# Allegro board AX7201-Carrier.brd
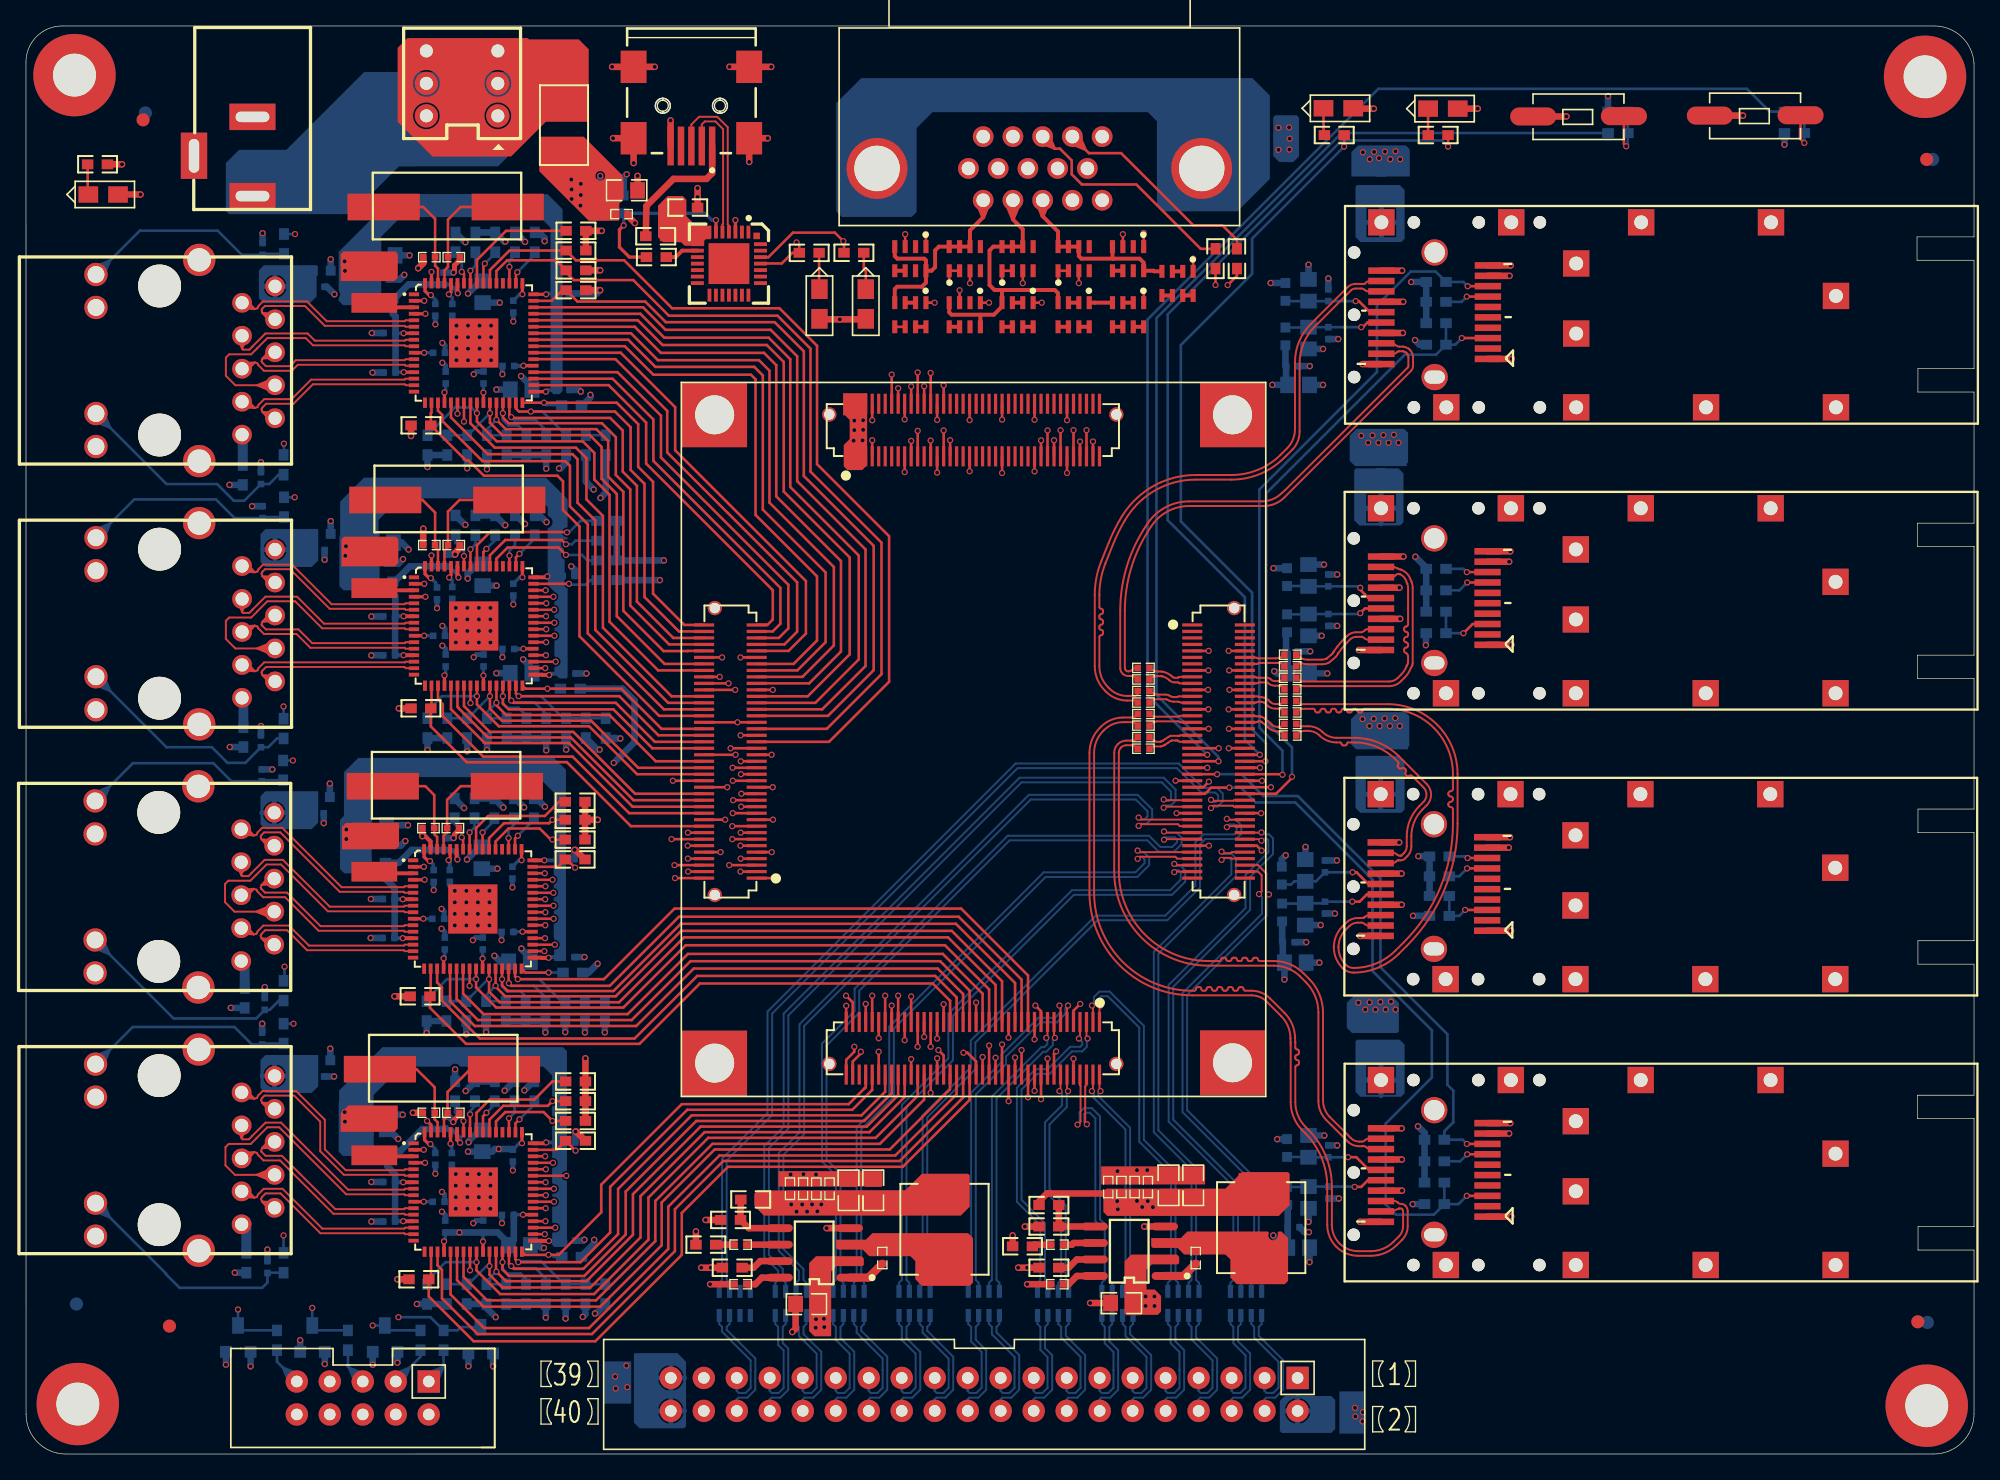
[diagram p0: board, top side]
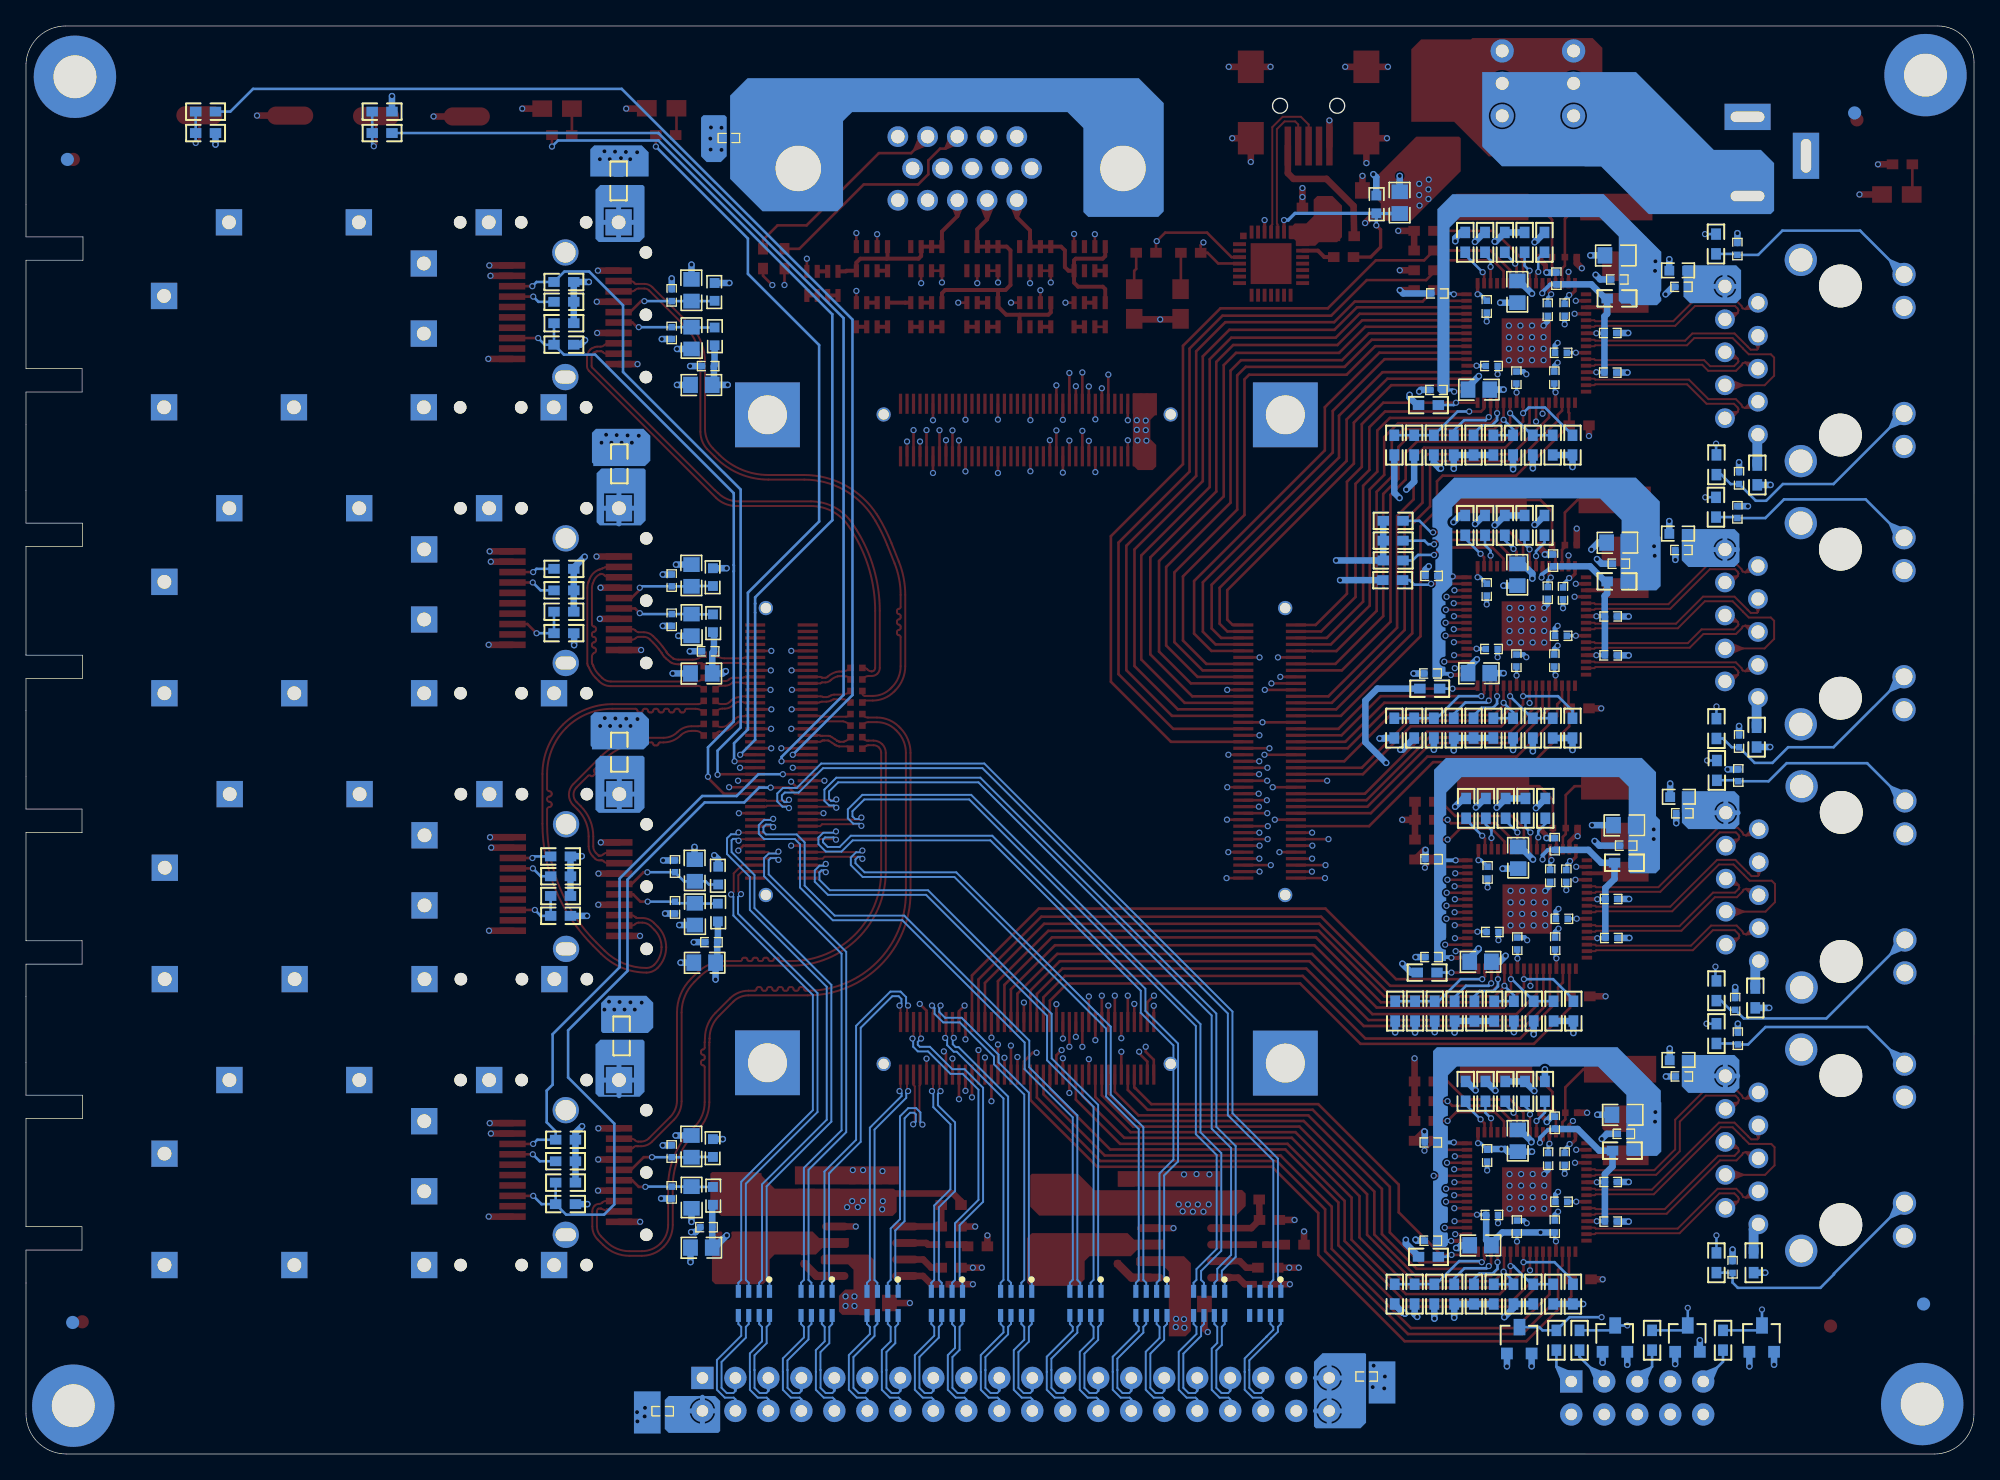
[diagram p1: board, bottom side, seen from below]

Outline 150 x 110 mm; copper layers: TOP, SGND, SVCC, BOTTOM. Coordinates in mm from the lower left corner of the outline.
Outline path: 0,107.21 arc(0.82,109.18) 2.79,110 146.94,110 arc(149.05,109.16) 150,107.1 150,93.75 145.61,93.75 145.61,91.95 150,91.95 150,83.6 145.68,83.6 145.68,81.8 150,81.8 150,71.7 145.65,71.7 145.65,69.9 150,69.9 150,61.53 145.65,61.53 145.65,59.73 150,59.73 150,49.68 145.68,49.68 145.68,47.88 145.69,47.88 150,47.88 150,39.54 150,39.54 145.68,39.54 145.68,37.74 150,37.74 150,27.64 145.66,27.64 145.66,25.84 145.67,25.85 150,25.85 150,17.51 145.69,17.51 145.69,15.71 150,15.71 150,13.13 150,3.1 arc(149.09,0.91) 146.91,0 3.07,0 arc(0.91,0.9) 0.01,3.07 0,107.21

## Design rules (mm)
net group IO1_15N: nets IO1_15N IO1_15P
net group N16786323: nets N16786264 N16786323
net group PHY_MDI0_N: nets E3_PHY_MDI0_N E3_PHY_MDI0_P
net group PHY_MDI1_N: nets E3_PHY_MDI1_N E3_PHY_MDI1_P
net group PHY_MDI2_P: nets E3_PHY_MDI2_N E3_PHY_MDI2_P
net group PHY_MDI3_N: nets E3_PHY_MDI3_N E3_PHY_MDI3_P
net group J4-DIFF: nets EX_IO1_1N EX_IO1_1P EX_IO1_2N EX_IO1_2P EX_IO1_3N EX_IO1_3P EX_IO1_4N EX_IO1_4P EX_IO1_5N EX_IO1_5P EX_IO1_6N EX_IO1_6P EX_IO1_7N EX_IO1_7P EX_IO1_8N EX_IO1_8P EX_IO1_9N EX_IO1_9P EX_IO1_10N EX_IO1_10P EX_IO1_11N EX_IO1_11P EX_IO1_12N EX_IO1_12P EX_IO1_13N EX_IO1_13P EX_IO1_14N EX_IO1_14P EX_IO1_15N EX_IO1_15P EX_IO1_16N EX_IO1_16P EX_IO1_17N EX_IO1_17P IO1_1N IO1_1P IO1_2N IO1_2P IO1_3N IO1_3P IO1_4N IO1_4P IO1_5N IO1_5P IO1_6N IO1_6P IO1_7N IO1_7P IO1_8N IO1_8P IO1_9N IO1_9P IO1_10N IO1_10P IO1_11N IO1_11P IO1_12N IO1_12P IO1_13N IO1_13P IO1_14N IO1_14P IO1_16N IO1_16P IO1_17N IO1_17P
net group MGT: nets MGT_CLK1_N MGT_CLK1_P MGT_RX0_N MGT_RX0_P MGT_RX1_N MGT_RX1_P MGT_RX2_N MGT_RX2_P MGT_RX3_N MGT_RX3_P MGT_TX0_N MGT_TX0_P MGT_TX1_N MGT_TX1_P MGT_TX2_N MGT_TX2_P MGT_TX3_N MGT_TX3_P SFP1_RX_N SFP1_RX_P SFP1_TX_N SFP1_TX_P SFP2_RX_N SFP2_RX_P SFP2_TX_N SFP2_TX_P SFP3_RX_N SFP3_RX_P SFP3_TX_N SFP3_TX_P SFP4_RX_N SFP4_RX_P SFP4_TX_N SFP4_TX_P
net group PHY_MDI: nets E1_PHY_MDI0_N E1_PHY_MDI0_P E1_PHY_MDI1_N E1_PHY_MDI1_P E1_PHY_MDI2_N E1_PHY_MDI2_P E1_PHY_MDI3_N E1_PHY_MDI3_P E2_PHY_MDI0_N E2_PHY_MDI0_P E2_PHY_MDI1_N E2_PHY_MDI1_P E2_PHY_MDI2_N E2_PHY_MDI2_P E2_PHY_MDI3_N E2_PHY_MDI3_P E4_PHY_MDI0_N E4_PHY_MDI0_P E4_PHY_MDI1_N E4_PHY_MDI1_P E4_PHY_MDI2_N E4_PHY_MDI2_P E4_PHY_MDI3_N E4_PHY_MDI3_P
net group VGA_B: nets N16979107 N16979113 N16979117 VGA_B VGA_B0
net group VGA_G: nets N16978989 N16978991 N16978997 N16979015 VGA_G

## Placement (name value [footprint] x y rotation side)
C1  0.1uF  [C0402]  97.36 61.57 0 top
C2  0.1uF  [C0402]  97.36 60.68 0 top
C3  0.1uF  [C0402]  86.06 60.55 0 top
C4  0.1uF  [C0402]  97.36 59.79 0 top
C5  0.1uF  [C0402]  86.06 59.66 0 top
C6  0.1uF  [C0402]  97.36 58.9 0 top
C7  0.1uF  [C0402]  86.06 58.78 0 top
C8  0.1uF  [C0402]  97.36 58.01 0 top
C9  0.1uF  [C0402]  86.06 57.89 0 top
C10  0.1uF  [C0402]  97.36 57.12 0 top
C11  0.1uF  [C0402]  86.06 57 0 top
C12  0.1uF  [C0402]  97.36 56.24 0 top
C13  0.1uF  [C0402]  86.06 56.11 0 top
C14  0.1uF  [C0402]  97.36 55.35 0 top
C15  0.1uF  [C0402]  86.06 55.22 0 top
C16  0.1uF  [C0402]  86.06 54.33 0 top
C17  22uF  [C0805]  27.05 26.14 0 bottom
C18  0.1uF  [C0402]  26.97 24.66 0 bottom
C19  0.1uF  [C0402]  32.28 25.53 90 bottom
C20  0.1uF  [C0402]  27.97 20.95 180 bottom
C21  0.1uF  [C0402]  27.97 17.91 180 bottom
C22  22uF  [C0805]  38 16.08 0 bottom
C23  0.1uF  [C0402]  31.52 22.73 270 bottom
C24  22uF  [C0805]  35.13 24.13 90 bottom
C25  0.1uF  [C0402]  37.11 18.41 180 bottom
C26  0.1uF  [C0402]  32.79 22.73 270 bottom
C27  0.1uF  [C0402]  37.49 22.99 270 bottom
C28  0.1uF  [C0402]  35.2 17.53 90 bottom
C29  0.1uF  [C0402]  31.78 19.43 0 bottom
C30  0.1uF  [C0402]  32.28 17.53 90 bottom
C31  0.1uF  [C0402]  41.83 24 0 bottom
C32  0.1uF  [C0402]  41.83 16.43 0 bottom
C33  0.1uF  [C0402]  18.59 14.4 90 bottom
C34  0.1uF  [C0402]  18.19 32 90 bottom
C35  0.1uF  [C0402]  22.5 29.08 0 bottom
C36  1uF  [C0603]  22.75 30.33 0 bottom
C37  22pF  [C0402]  32.92 26.29 0 top
C38  22pF  [C0402]  31.01 26.29 180 top
C39  22uF  [C0805]  26.92 48.44 0 bottom
C40  0.1uF  [C0402]  41.78 38.28 0 bottom
C41  0.1uF  [C0402]  32.28 46.99 90 bottom
C42  0.1uF  [C0402]  27.91 39.75 180 bottom
C43  0.1uF  [C0402]  27.93 42.75 180 bottom
C44  22uF  [C0805]  38 37.92 0 bottom
C45  0.1uF  [C0402]  37.46 44.79 270 bottom
C46  22uF  [C0805]  35.1 45.93 90 bottom
C47  0.1uF  [C0402]  37.08 40.21 180 bottom
C48  0.1uF  [C0402]  32.25 39.32 90 bottom
C49  0.1uF  [C0402]  31.74 41.23 0 bottom
C50  0.1uF  [C0402]  31.39 44.53 270 bottom
C51  0.1uF  [C0402]  35.17 39.32 90 bottom
C52  0.1uF  [C0402]  32.63 44.53 270 bottom
C53  0.1uF  [C0402]  26.8 46.86 0 bottom
C54  0.1uF  [C0402]  41.78 45.82 0 bottom
C55  0.1uF  [C0402]  18.39 34.67 90 bottom
C56  0.1uF  [C0402]  18.15 52.28 90 bottom
C57  0.1uF  [C0402]  22.47 49.36 0 bottom
C58  1uF  [C0603]  22.71 50.6 0 bottom
C59  22pF  [C0402]  32.89 48.21 0 top
C60  22pF  [C0402]  30.98 48.21 180 top
C61  22uF  [C0805]  27.46 70.21 0 bottom
C62  0.1uF  [C0402]  27.36 68.58 0 bottom
C63  0.1uF  [C0402]  32.41 68.83 90 bottom
C64  0.1uF  [C0402]  27.97 61.52 180 bottom
C65  0.1uF  [C0402]  27.97 64.52 180 bottom
C66  22uF  [C0805]  35.16 67.73 90 bottom
C67  0.1uF  [C0402]  31.81 63.03 0 bottom
C68  22uF  [C0805]  38.13 60.15 0 bottom
C69  0.1uF  [C0402]  37.52 66.58 270 bottom
C70  0.1uF  [C0402]  31.65 66.29 270 bottom
C71  0.1uF  [C0402]  35.24 61.12 90 bottom
C72  0.1uF  [C0402]  37.14 62.01 180 bottom
C73  0.1uF  [C0402]  32.32 61.12 90 bottom
C74  0.1uF  [C0402]  32.82 66.33 270 bottom
C75  0.1uF  [C0402]  41.78 67.64 0 bottom
C76  0.1uF  [C0402]  41.86 60.12 0 bottom
C77  0.1uF  [C0402]  18.09 54.9 90 bottom
C78  0.1uF  [C0402]  18.22 72.55 90 bottom
C79  0.1uF  [C0402]  22.54 69.63 0 bottom
C80  1uF  [C0603]  22.78 70.88 0 bottom
C81  22pF  [C0402]  32.95 70.01 0 top
C82  22pF  [C0402]  31.05 70.01 180 top
C83  22uF  [C0805]  27.58 92.33 0 bottom
C84  0.1uF  [C0402]  41.4 81.97 0 bottom
C85  0.1uF  [C0402]  28 86.35 180 bottom
C86  0.1uF  [C0402]  28 83.3 180 bottom
C87  0.1uF  [C0402]  32.16 90.55 90 bottom
C88  22uF  [C0805]  38.13 81.99 0 bottom
C89  0.1uF  [C0402]  35.24 82.92 90 bottom
C90  22uF  [C0805]  35.16 89.52 90 bottom
C91  0.1uF  [C0402]  37.14 83.81 180 bottom
C92  0.1uF  [C0402]  32.82 88.13 270 bottom
C93  0.1uF  [C0402]  32.32 82.92 90 bottom
C94  0.1uF  [C0402]  37.52 88.38 270 bottom
C95  0.1uF  [C0402]  31.52 88.14 270 bottom
C96  0.1uF  [C0402]  31.81 84.83 0 bottom
C97  0.1uF  [C0402]  27.48 90.47 0 bottom
C98  0.1uF  [C0402]  41.33 89.4 0 bottom
C99  0.1uF  [C0402]  18.09 75.17 90 bottom
C100  0.1uF  [C0402]  18.22 92.83 90 bottom
C101  0.1uF  [C0402]  22.54 89.91 0 bottom
C102  1uF  [C0603]  22.78 91.15 0 bottom
C103  22pF  [C0402]  32.95 92.19 0 top
C104  22pF  [C0402]  31.05 92.19 180 top
C105  10uF  [C0805]  98.5 44.95 90 bottom
C106  0.1uF  [C0402]  100.03 45.27 90 bottom
C107  10uF  [C0805]  98.5 41.58 270 bottom
C108  22uF  [C0805]  97.74 37.85 0 bottom
C109  0.1uF  [C0402]  97.23 39.43 0 bottom
C110  0.1uF  [C0402]  100.03 42.09 270 bottom
C111  22uF  [C0805]  97.99 15.9 0 bottom
C112  10uF  [C0805]  98.76 23.7 90 bottom
C113  0.1uF  [C0402]  100.28 23.32 90 bottom
C114  0.1uF  [C0402]  97.61 17.47 0 bottom
C115  10uF  [C0805]  98.76 19.76 270 bottom
C116  0.1uF  [C0402]  100.28 20.14 270 bottom
C117  22uF  [C0805]  97.99 60.13 0 bottom
C118  0.1uF  [C0402]  97.49 61.83 0 bottom
C119  10uF  [C0805]  98.76 67.67 90 bottom
C120  0.1uF  [C0402]  100.28 67.29 90 bottom
C121  10uF  [C0805]  98.76 63.86 270 bottom
C122  0.1uF  [C0402]  100.28 64.24 270 bottom
C123  10uF  [C0805]  98.76 89.64 90 bottom
C124  0.1uF  [C0402]  100.28 89.26 90 bottom
C125  10uF  [C0805]  98.76 85.96 270 bottom
C126  22uF  [C0805]  97.99 82.35 0 bottom
C127  0.1uF  [C0402]  97.49 83.8 0 bottom
C128  0.1uF  [C0402]  100.28 86.34 270 bottom
C129  1uF  [C0603]  46.02 96.25 90 bottom
C130  10uF  [C0805]  44.22 96.39 90 bottom
C131  0.1uF  [C0402]  100.99 3.3 0 bottom
C132  0.1uF  [C0402]  46.76 5.97 180 bottom
C133  10uF  [C0805]  46.25 97.33 0 top
C134  0.1uF  [C0402]  45.87 95.5 0 top
C135  0.01uF  [C0402]  90.07 15.11 90 top
C136  10uF  [C0805]  84.35 11.63 180 top
C137  0.1uF  [C0402]  79.4 13.08 180 top
C138  10uF  [C0805]  89.89 20.7 90 top
C139  10uF  [C0805]  87.99 20.7 90 top
C140  0.1uF  [C0402]  83.34 20.57 90 top
C141  0.1uF  [C0402]  84.35 20.57 90 top
C142  0.1uF  [C0402]  85.37 20.57 90 top
C143  0.1uF  [C0402]  86.39 20.57 90 top
C144  33nF  [C0402]  79.4 16.13 180 top
C145  0.01uF  [C0402]  65.94 15.11 90 top
C146  10uF  [C0805]  60.1 11.56 180 top
C147  10uF  [C0805]  65.25 20.32 90 top
C148  10uF  [C0805]  63.35 20.32 90 top
C149  0.1uF  [C0402]  58.83 20.45 90 top
C150  0.1uF  [C0402]  59.84 20.45 90 top
C151  0.1uF  [C0402]  60.86 20.45 90 top
C152  0.1uF  [C0402]  61.87 20.45 90 top
C153  0.1uF  [C0402]  55.02 13.08 180 top
C154  33nF  [C0402]  55.02 16.13 180 top
C261  0.1uF  [C0402]  95.86 101.37 180 bottom
CN1  AJ243-3-3C  [CN1-DCJACK]  17.44 103 180 top
CON1  -  [AXK680337YG]  72.91 78.87 0 top
CON2  -  [AXK680337YG]  54.24 54.11 90 top
CON3  -  [AXK680337YG]  72.91 31.25 180 top
CON4  -  [AXK680337YG]  91.83 54.11 270 top
D1  BAT54S  [SOT23]  35.97 7.75 180 bottom
D2  BAT54S  [SOT23]  28.6 7.87 180 bottom
D3  BAT54S  [SOT23]  23.01 7.87 180 bottom
D4  BAT54S  [SOT23]  17.3 7.87 180 bottom
F1  2A  [FUSE_1812]  41.43 102.36 270 top
J1  HR911130A  [GE_RJ45]  10.26 29.15 180 top
J2  HR911130A  [GE_RJ45]  10.22 49.42 180 top
J3  HR911130A  [GE_RJ45]  10.29 69.7 180 top
J4  HR911130A  [GE_RJ45]  10.29 89.97 180 top
J5  SFP CAGEx1  [SD-74737-0033]  112.51 40.31 180 top
J6  SFP CAGEx1  [SD-74737-0033]  112.54 18.29 180 top
J7  SFP CAGEx1  [SD-74737-0033]  112.54 62.33 180 top
J8  SFP CAGEx1  [SD-74737-0033]  112.57 84.35 180 top
J9  HEADER 5X2  [JTAG-10]  31.01 5.59 180 top
J10  MINI_USB  [MINIUSBB]  51.24 100.75 270 top
J11  HEADER 20x2/M  [IDC-40J]  73.78 4.59 180 top
J23  VGA Connector  [VGA]  74.86 99.03 90 top
KEY1  Button  [KEY735SO]  123.04 103.05 180 top
KEY2  Button  [KEY735SO]  136.64 103.12 180 top
L1  2.2uH  [LVS303010]  26.82 23.51 0 top
L2  2.2uH  [LVS303010]  26.82 45.36 0 top
L3  2.2uH  [LVS303010]  26.82 67.2 0 top
L4  2.2uH  [LVS303010]  26.82 89.17 0 top
L5  220Ohm@100MHz  [L0603]  96.72 41.71 90 bottom
L6  220Ohm@100MHz  [L0603]  96.7 44.56 270 bottom
L7  220Ohm@100MHz  [L0603]  97.1 19.89 90 bottom
L8  220Ohm@100MHz  [L0603]  97.1 23.57 270 bottom
L9  220Ohm@100MHz  [L0603]  97.1 63.99 90 bottom
L10  220Ohm@100MHz  [L0603]  97.1 67.55 270 bottom
L11  220Ohm@100MHz  [L0603]  96.98 86.09 90 bottom
L12  220Ohm@100MHz  [L0603]  96.98 89.52 270 bottom
L13  10uH  [SMTDR75-100M]  95.11 17.44 90 top
L14  10uH  [SMTDR75-100M]  70.73 17.31 90 top
LED1  RED  [LEDSO]  99.91 103.66 0 top
LED2  RED  [LEDSO]  107.96 103.63 0 top
LED3  RED  [LEDSO]  64.66 89.73 270 top
LED4  RED  [LEDSO]  61.1 89.73 270 top
LED5  RED  [LEDSO]  4.8 97.02 0 top
NOREF  -  [unnamed]  146.23 106.09 0 top
NOREF#2  -  [#2]  0 4.13 0 top
NOREF#3  -  [unnamed]  3.99 3.85 0 top
NOREF#4  -  [unnamed#2]  92.9 30.14 90 top
NOREF#5  -  [unnamed#2]  53.03 30.11 90 top
NOREF#6  -  [unnamed#3]  9.02 102.77 0 top
NOREF#7  -  [unnamed#3]  11.05 9.86 0 top
NOREF#8  -  [unnamed#3]  145.67 10.19 0 top
NOREF#9  -  [unnamed#2]  53.03 80.05 90 top
NOREF#10  -  [unnamed#2]  92.9 80.05 90 top
NOREF#11  -  [unnamed]  3.74 106.21 0 top
NOREF#12  -  [unnamed#3]  146.35 99.72 0 top
NOREF#13  -  [unnamed]  146.36 3.72 0 top
NOREF#14  -  [#2]  3.66 0.01 90 top
NOREF#15  -  [#2]  295.55 15.74 0 top
NOREF#16  -  [unnamed#3]  146.41 10.13 180 bottom
NOREF#17  -  [unnamed#3]  3.89 11.56 180 bottom
NOREF#18  -  [unnamed#3]  9.19 103.3 180 bottom
NOREF#19  -  [unnamed#3]  146.81 99.72 180 bottom
R1  0R  [R0603]  27.08 23.36 0 bottom
R2  1.5K  [R0603]  42.32 25.66 0 top
R3  1.5K  [R0603]  42.32 27.18 0 top
R4  0R  [R0603]  16.97 14.73 90 bottom
R5  330R  [R0603]  19.83 32.38 270 bottom
R6  1K  [R0603]  42.32 24.13 180 top
R7  330R  [R0603]  19.83 14.73 270 bottom
R8  2.49K  [R0603]  33.04 27.94 270 bottom
R9  4.7K  [R0603]  42.01 15.19 180 bottom
R10  4.7K  [R0603]  41.56 12.32 90 bottom
R11  10K  [R0603]  42.32 28.7 180 top
R12  10K  [R0603]  36.1 27.94 90 bottom
R13  10K  [R0603]  34.57 27.94 90 bottom
R14  10K  [R0603]  32.41 12.32 270 bottom
R15  10K  [R0603]  36.98 12.32 270 bottom
R16  NC  [R0603]  43.07 12.32 270 bottom
R17  4.7K  [R0603]  39.14 27.94 90 bottom
R18  4.7K  [R0603]  37.62 27.94 90 bottom
R19  10K  [R0603]  30.88 12.32 270 bottom
R20  10K  [R0603]  38.5 12.32 270 bottom
R21  10K  [R0603]  40.03 12.32 270 bottom
R22  4.7K  [R0603]  30.25 13.46 180 top
R23  NC  [R0603]  33.94 12.32 90 bottom
R24  NC  [R0603]  35.46 12.32 90 bottom
R25  10K  [R0603]  44.61 12.32 90 bottom
R26  0R  [R0603]  26.92 45.54 0 bottom
R27  1.5K  [R0603]  42.28 47.33 0 top
R28  330R  [R0603]  19.83 35.69 270 bottom
R29  1.5K  [R0603]  42.28 48.85 0 top
R30  330R  [R0603]  19.8 52.66 270 bottom
R31  0R  [R0603]  16.84 35.13 90 bottom
R32  1K  [R0603]  42.28 45.8 180 top
R33  2.49K  [R0603]  33.01 49.74 270 bottom
R34  4.7K  [R0603]  42.11 37.09 180 bottom
R35  4.7K  [R0603]  41.52 34.12 90 bottom
R36  10K  [R0603]  42.28 50.24 180 top
R37  10K  [R0603]  36.06 49.74 90 bottom
R38  10K  [R0603]  34.54 49.74 90 bottom
R39  10K  [R0603]  36.95 34.12 270 bottom
R40  4.7K  [R0603]  39.11 49.74 90 bottom
R41  10K  [R0603]  38.47 34.12 270 bottom
R42  10K  [R0603]  39.99 34.12 270 bottom
R43  10K  [R0603]  32.37 34.12 270 bottom
R44  NC  [R0603]  43.04 34.12 270 bottom
R45  10K  [R0603]  30.85 34.12 270 bottom
R46  4.7K  [R0603]  37.59 49.74 90 bottom
R47  4.7K  [R0603]  30.35 35.26 180 top
R48  NC  [R0603]  33.9 34.12 90 bottom
R49  NC  [R0603]  35.43 34.12 90 bottom
R50  10K  [R0603]  44.57 34.12 90 bottom
R51  0R  [R0603]  27.49 67.22 0 bottom
R52  330R  [R0603]  19.83 55.88 270 bottom
R53  1.5K  [R0603]  44.73 68.83 0 bottom
R54  1.5K  [R0603]  44.73 70.35 0 bottom
R55  330R  [R0603]  19.87 72.93 270 bottom
R56  0R  [R0603]  16.74 55.22 90 bottom
R57  1K  [R0603]  44.75 67.31 180 bottom
R58  2.49K  [R0603]  33.07 71.54 270 bottom
R59  4.7K  [R0603]  41.91 58.96 180 bottom
R60  4.7K  [R0603]  41.59 55.92 90 bottom
R61  10K  [R0603]  44.73 71.89 180 bottom
R62  10K  [R0603]  36.13 71.54 90 bottom
R63  10K  [R0603]  34.61 71.54 90 bottom
R64  4.7K  [R0603]  39.18 71.54 90 bottom
R65  10K  [R0603]  30.92 55.92 270 bottom
R66  10K  [R0603]  38.54 55.92 270 bottom
R67  10K  [R0603]  40.06 55.92 270 bottom
R68  10K  [R0603]  32.44 55.92 270 bottom
R69  10K  [R0603]  37.01 55.92 270 bottom
R70  NC  [R0603]  43.11 55.92 270 bottom
R71  4.7K  [R0603]  37.65 71.54 90 bottom
R72  4.7K  [R0603]  30.41 57.44 180 top
R73  NC  [R0603]  33.97 55.92 90 bottom
R74  NC  [R0603]  35.49 55.92 90 bottom
R75  10K  [R0603]  44.64 55.92 90 bottom
R76  0R  [R0603]  27.49 89.01 0 bottom
R77  1.5K  [R0603]  42.35 91.18 0 top
R78  1.5K  [R0603]  42.35 92.7 0 top
R79  330R  [R0603]  19.83 76.2 270 bottom
R80  0R  [R0603]  16.69 75.41 90 bottom
R81  330R  [R0603]  19.87 93.21 270 bottom
R82  1K  [R0603]  42.35 89.65 180 top
R83  2.49K  [R0603]  33.07 93.33 270 bottom
R84  4.7K  [R0603]  42.01 80.8 180 bottom
R85  4.7K  [R0603]  41.59 77.71 90 bottom
R86  10K  [R0603]  42.35 94.22 180 top
R87  10K  [R0603]  36.13 93.33 90 bottom
R88  10K  [R0603]  34.61 93.33 90 bottom
R89  10K  [R0603]  38.54 77.71 270 bottom
R90  10K  [R0603]  32.44 77.71 270 bottom
R91  4.7K  [R0603]  39.18 93.33 90 bottom
R92  10K  [R0603]  37.01 77.71 270 bottom
R93  NC  [R0603]  43.11 77.71 270 bottom
R94  10K  [R0603]  30.92 77.71 270 bottom
R95  10K  [R0603]  40.06 77.71 270 bottom
R96  4.7K  [R0603]  37.65 93.33 90 bottom
R97  4.7K  [R0603]  30.41 79.23 180 top
R98  NC  [R0603]  33.97 77.71 90 bottom
R99  NC  [R0603]  35.49 77.71 90 bottom
R100  10K  [R0603]  44.64 77.71 90 bottom
R101  4.7K  [R0603]  108.83 42.99 180 bottom
R102  4.7K  [R0603]  108.83 46.03 180 bottom
R103  NC  [R0603]  108.83 41.45 0 bottom
R104  4.7K  [R0603]  108.83 44.5 0 bottom
R105  0R  [R0603]  104.14 32.21 270 bottom
R106  0R  [R0603]  104.31 54.07 270 bottom
R107  4.7K  [R0603]  108.45 20.91 180 bottom
R108  4.7K  [R0603]  108.45 24.21 180 bottom
R109  NC  [R0603]  108.45 19.25 0 bottom
R110  4.7K  [R0603]  108.45 22.55 0 bottom
R111  4.7K  [R0603]  108.58 64.88 180 bottom
R112  4.7K  [R0603]  108.58 68.19 180 bottom
R113  NC  [R0603]  108.58 63.23 0 bottom
R114  4.7K  [R0603]  108.58 66.53 0 bottom
R115  0R  [R0603]  104.31 76.27 270 bottom
R116  0R  [R0603]  104.36 98.06 270 bottom
R117  4.7K  [R0603]  108.58 87.11 180 bottom
R118  4.7K  [R0603]  108.58 90.28 180 bottom
R119  NC  [R0603]  108.58 85.45 0 bottom
R120  4.7K  [R0603]  108.58 88.75 0 bottom
R121  33R  [R0603]  32.16 8.76 90 bottom
R122  33R  [R0603]  30.38 8.76 90 bottom
R123  33R  [R0603]  24.79 8.76 90 bottom
R124  33R  [R0603]  19.33 8.76 90 bottom
R125  10K  [R0603]  48.54 92.2 180 top
R126  510R  [R0603]  63.75 92.53 0 top
R127  510R  [R0603]  60.31 92.53 0 top
R128  NC  [R0603]  50.95 96.01 180 top
R129  0R  [R0603]  48.49 93.81 0 top
R130  10K  [R0603]  136.17 101.75 180 bottom
R131  10K  [R0603]  122.58 103.4 180 bottom
R132  1K  [R0603]  136.17 103.4 180 bottom
R133  1K  [R0603]  122.58 101.75 180 bottom
R134  220R  [R0603]  108.74 101.6 180 top
R135  220R  [R0603]  100.74 101.6 180 top
R136  220R  [R0603]  5.51 99.34 180 top
R138  47K  [R0603]  78.77 14.35 0 top
R139  44.2K/1%  [R0603]  78.77 19.18 0 top
R140  10K/1%  [R0603]  78.77 17.52 180 top
R141  2.2K  [R0603]  76.73 16 180 top
R142  47K  [R0603]  54.38 14.35 0 top
R143  26.1K/1%  [R0603]  55.8 19.61 180 top
R144  10K/1%  [R0603]  54.25 18.03 180 top
R145  2.2K  [R0603]  52.35 16.13 180 top
R183  33R  [R0603]  91.6 92.08 270 top
R184  33R  [R0603]  93.25 92.08 270 top
RN1  33R  [RN-8P]  92.75 12.53 270 bottom
RN2  33R  [RN-8P]  87.92 12.53 270 bottom
RN3  33R  [RN-8P]  82.84 12.53 270 bottom
RN4  33R  [RN-8P]  77.89 12.53 270 bottom
RN5  33R  [RN-8P]  72.55 12.53 270 bottom
RN6  33R  [RN-8P]  67.22 12.53 270 bottom
RN7  33R  [RN-8P]  62.14 12.53 270 bottom
RN8  33R  [RN-8P]  57.7 12.53 270 bottom
RN9  33R  [RN-8P]  53.38 12.53 270 bottom
RN10  1K  [RN-8P]  71.09 91.15 90 top
RN11  2K  [RN-8P]  69.3 93 270 top
RN12  2K  [RN-8P]  69.3 88.69 270 top
RN13  1K  [RN-8P]  75.15 91.15 90 top
RN14  2K  [RN-8P]  73.49 88.69 270 top
RN15  2K  [RN-8P]  77.55 88.69 270 top
RN16  2K  [RN-8P]  86.06 88.69 270 top
RN17  2K  [RN-8P]  81.87 88.69 270 top
RN18  1K  [RN-8P]  79.47 91.15 90 top
RN19  2K  [RN-8P]  86.06 93 270 top
RN20  2K  [RN-8P]  89.87 91.1 270 top
SW1  Power Switch  [POWER_SW]  30.83 105.58 180 top
U1  RTL8211EG QFN64  [QFN65-050-0909]  34.44 20.19 270 top
U2  RTL8211EG QFN64  [QFN65-050-0909]  34.41 41.98 270 top
U3  RTL8211EG QFN64  [QFN65-050-0909]  34.47 63.78 270 top
U4  RTL8211EG QFN64  [QFN65-050-0909]  34.47 85.58 270 top
U5  CP2102-GM  [QFN-28]  54.13 91.69 270 top
U6  MP1482DS  [MP1482-SOIC8]  84.99 15.62 90 top
U7  MP1482DS  [MP1482-SOIC8]  60.73 15.49 90 top
Y1  25Mhz  [XT49M-CRYSTAL]  36.8 29.64 180 top
Y2  25Mhz  [XT49M-CRYSTAL]  37.03 51.44 180 top
Y3  25Mhz  [XT49M-CRYSTAL]  37.22 73.49 180 top
Y4  25Mhz  [XT49M-CRYSTAL]  37.09 96.05 180 top

## Library data of the parts
C1-C32 C37-C54 C59-C76 C81-C98 C103-C133 C135-C139 C144-C148 C153 C154 C261 = CAP NP
C33-C36 C55-C58 C77-C80 C99-C102 = CAP_3
C134 C140-C143 C149-C152 = C_1
CN1 = AJ243_0
CON1 = CON40X2_0_0
CON2 = CON40X2_0_1
CON3 = CON40X2_0_2
CON4 = CON40X2_0_3
D1-D4 = SBL1645CT/TO_0
F1 = FUSE
J1-J4 = GE_RJ45_2
J5-J8 = SFP_AND_CONN_1
J9 = HEADER 5X2
J10 = USB_B_3
J11 = HEADER 20x2/M
J23 = CONNECTOR CENT14-P_1
KEY1 KEY2 = Button_0
L1-L4 L13 L14 = INDUCTOR
L5-L12 = MPZ1608
LED1-LED5 = LN211WP
R1-R4 R14-R16 R19-R21 R23-R27 R29 R31 R39 R41-R45 R48-R51 R53 R54 R56 R65-R70 R73-R78 R80 R89 R90 R92-R95 R98-R100 R121-R136 R138-R145 R183 R184 = RESISTOR
R5 R7 R28 R30 R52 R55 R79 R81 = R_2
R6 R8-R13 R17 R18 R22 R32-R38 R40 R46 R47 R57-R63 R71 R72 R82-R88 R91 R96 R97 = R_Generic
R64 = R_Generic: signal model: R_GENERIC_R0402_33R_33R
R101-R120 = R
RN1-RN16 RN18 RN19 = RESARR_IS_4/SM
RN17 RN20 = RESARR_IS_4/SM: signal model: RESARR_IS_4/SM_RN-8P_33R_33R
SW1 = SENS59150-SPST_1
U1-U4 = RTL8169s_2
U5 = CP2102_2
U6 U7 = MP2305
Y1-Y4 = CRYSTAL

## Footprints (pads in the part's own frame, mm; a bottom-side part is the same pattern mirrored in y, then rotated)
AXK680337YG
  rect 0.25x1.55 smd: 1(-9.75,-2.025) 2(-9.75,2.025) 3(-9.25,-2.025) 4(-9.25,2.025) 5(-8.75,-2.025) 6(-8.75,2.025) 7(-8.25,-2.025) 8(-8.25,2.025) 9(-7.75,-2.025) 10(-7.75,2.025) 11(-7.25,-2.025) 12(-7.25,2.025) 13(-6.75,-2.025) 14(-6.75,2.025) 15(-6.25,-2.025) 16(-6.25,2.025) 17(-5.75,-2.025) 18(-5.75,2.025) 19(-5.25,-2.025) 20(-5.25,2.025) 21(-4.75,-2.025) 22(-4.75,2.025) 23(-4.25,-2.025) 24(-4.25,2.025) 25(-3.75,-2.025) 26(-3.75,2.025) 27(-3.25,-2.025) 28(-3.25,2.025) 29(-2.75,-2.025) 30(-2.75,2.025) 31(-2.25,-2.025) 32(-2.25,2.025) 33(-1.75,-2.025) 34(-1.75,2.025) 35(-1.25,-2.025) 36(-1.25,2.025) 37(-0.75,-2.025) 38(-0.75,2.025) 39(-0.25,-2.025) 40(-0.25,2.025) 41(0.25,-2.025) 42(0.25,2.025) 43(0.75,-2.025) 44(0.75,2.025) 45(1.25,-2.025) 46(1.25,2.025) 47(1.75,-2.025) 48(1.75,2.025) 49(2.25,-2.025) 50(2.25,2.025) 51(2.75,-2.025) 52(2.75,2.025) 53(3.25,-2.025) 54(3.25,2.025) 55(3.75,-2.025) 56(3.75,2.025) 57(4.25,-2.025) 58(4.25,2.025) 59(4.75,-2.025) 60(4.75,2.025) 61(5.25,-2.025) 62(5.25,2.025) 63(5.75,-2.025) 64(5.75,2.025) 65(6.25,-2.025) 66(6.25,2.025) 67(6.75,-2.025) 68(6.75,2.025) 69(7.25,-2.025) 70(7.25,2.025) 71(7.75,-2.025) 72(7.75,2.025) 73(8.25,-2.025) 74(8.25,2.025) 75(8.75,-2.025) 76(8.75,2.025) 77(9.25,-2.025) 78(9.25,2.025) 79(9.75,-2.025) 80(9.75,2.025)
  round 1.1 hole 0.8: 81(-11.05,1.2) 82(11.05,1.2)
C0402
  rect 0.508x0.508 smd: 1(-0.457,0) 2(0.457,0)
C0603
  rect 0.762x0.762 smd: 1(-0.686,0) 2(0.686,0)
C0805
  rect 1.143x1.27 smd: 1(-0.838,0) 2(0.838,0)
CN1-DCJACK
  rect 3.556x2.032 hole 2.6x0.8: 1(0,0) 3(0,6.1)
  rect 2.032x3.556 hole 0.8x2.6: 2(4.5,2.997)
FUSE_1812
  rect 1.829x3.251 smd: 1(-1.93,0) 2(1.93,0)
GE_RJ45
  round 3.3 hole 3.3 unplated: (0,11.48) (0,0)
  round 1.8 hole 1.3: 11(4.9,-0.885) 12(4.9,1.655) 13(4.9,9.825) 14(4.9,12.365)
  round 2.489 hole 1.8: 15(-3.05,-2.01) 16(-3.05,13.49)
  round 1.524 hole 1.016: P1(-8.89,0.025) P2(-6.35,1.295) P3(-8.89,2.565) P4(-6.35,3.835) P5(-8.89,5.105) P6(-6.35,6.375) P7(-8.89,7.645) P8(-6.35,8.915) P9(-8.89,10.185) P10(-6.35,11.455)
IDC-40J
  rect 1.727x1.727 hole 0.889: 1(-24.13,-1.27)
  round 1.727 hole 0.889: 2(-24.13,1.27) 3(-21.59,-1.27) 4(-21.59,1.27) 5(-19.05,-1.27) 6(-19.05,1.27) 7(-16.51,-1.27) 8(-16.51,1.27) 9(-13.97,-1.27) 10(-13.97,1.27) 11(-11.43,-1.27) 12(-11.43,1.27) 13(-8.89,-1.27) 14(-8.89,1.27) 15(-6.35,-1.27) 16(-6.35,1.27) 17(-3.81,-1.27) 18(-3.81,1.27) 19(-1.27,-1.27) 20(-1.27,1.27) 21(1.27,-1.27) 22(1.27,1.27) 23(3.81,-1.27) 24(3.81,1.27) 25(6.35,-1.27) 26(6.35,1.27) 27(8.89,-1.27) 28(8.89,1.27) 29(11.43,-1.27) 30(11.43,1.27) 31(13.97,-1.27) 32(13.97,1.27) 33(16.51,-1.27) 34(16.51,1.27) 35(19.05,-1.27) 36(19.05,1.27) 37(21.59,-1.27) 38(21.59,1.27) 39(24.13,-1.27) 40(24.13,1.27)
JTAG-10
  rect 1.73x1.73 hole 0.89: 1(0,0)
  round 1.73 hole 0.89: 2(0,2.54) 3(2.54,0) 4(2.54,2.54) 5(5.08,0) 6(5.08,2.54) 7(7.62,0) 8(7.62,2.54) 9(10.16,0) 10(10.16,2.54)
KEY735SO
  oval 3.556x1.4 smd: 1(0,0) 2(6.985,0.025)
L0603
  rect 0.762x0.762 smd: 1(-0.686,0) 2(0.686,0)
LEDSO
  rect 1.524x1.27 smd: 1(2.286,0) 2(0,0)
LVS303010
  rect 3.531x1.524 smd: 1(0,-0.5) 2(0,2.5)
MINIUSBB
  rect 3x0.5 smd: 1(0,1.6) 2(0,0.8) 3(0,0) 4(0,-0.8) 5(0,-1.6)
  rect 2.5x2 smd: 6(-0.6,-4.45) 7(-6.1,-4.45) 8(-0.6,4.45) 9(-6.1,4.45)
MP1482-SOIC8
  oval 0.61x2.032 smd: 1(-1.905,-2.7) 2(-0.635,-2.7) 3(0.635,-2.7) 4(1.905,-2.7) 5(1.905,2.7) 6(0.635,2.7) 7(-0.635,2.7) 8(-1.905,2.7)
POWER_SW
  round 1.8 hole 1: 1(-5.5,2.5) 2(-5.5,0) 3(-5.5,-2.5) 4(0,2.5) 5(0,0) 6(0,-2.5)
QFN65-050-0909
  rect 0.3x0.8 smd: 1(-3.75,-4.6) 2(-3.25,-4.6) 3(-2.75,-4.6) 4(-2.25,-4.6) 5(-1.75,-4.6) 6(-1.25,-4.6) 7(-0.75,-4.6) 8(-0.25,-4.6) 9(0.25,-4.6) 10(0.75,-4.6) 11(1.25,-4.6) 12(1.75,-4.6) 13(2.25,-4.6) 14(2.75,-4.6) 15(3.25,-4.6) 16(3.75,-4.6) 33(3.75,4.6) 34(3.25,4.6) 35(2.75,4.6) 36(2.25,4.6) 37(1.75,4.6) 38(1.25,4.6) 39(0.75,4.6) 40(0.25,4.6) 41(-0.25,4.6) 42(-0.75,4.6) 43(-1.25,4.6) 44(-1.75,4.6) 45(-2.25,4.6) 46(-2.75,4.6) 47(-3.25,4.6) 48(-3.75,4.6)
  rect 0.8x0.3 smd: 17(4.6,-3.75) 18(4.6,-3.25) 19(4.6,-2.75) 20(4.6,-2.25) 21(4.6,-1.75) 22(4.6,-1.25) 23(4.6,-0.75) 24(4.6,-0.25) 25(4.6,0.25) 26(4.6,0.75) 27(4.6,1.25) 28(4.6,1.75) 29(4.6,2.25) 30(4.6,2.75) 31(4.6,3.25) 32(4.6,3.75) 49(-4.6,3.75) 50(-4.6,3.25) 51(-4.6,2.75) 52(-4.6,2.25) 53(-4.6,1.75) 54(-4.6,1.25) 55(-4.6,0.75) 56(-4.6,0.25) 57(-4.6,-0.25) 58(-4.6,-0.75) 59(-4.6,-1.25) 60(-4.6,-1.75) 61(-4.6,-2.25) 62(-4.6,-2.75) 63(-4.6,-3.25) 64(-4.6,-3.75)
  rect 3.8x3.8 smd: 65(0,0)
QFN-28
  rect 1x0.3 smd: 1(-2.43,1.5) 2(-2.43,1) 3(-2.43,0.5) 4(-2.43,0) 5(-2.43,-0.5) 6(-2.43,-1) 7(-2.43,-1.5) 15(2.43,-1.5) 16(2.43,-1) 17(2.43,-0.5) 18(2.43,0) 19(2.43,0.5) 20(2.43,1) 21(2.43,1.5)
  rect 0.3x1 smd: 8(-1.5,-2.43) 9(-1,-2.43) 10(-0.5,-2.43) 11(0,-2.43) 12(0.5,-2.43) 13(1,-2.43) 14(1.5,-2.43) 22(1.5,2.43) 23(1,2.43) 24(0.5,2.43) 25(0,2.43) 26(-0.5,2.43) 27(-1,2.43) 28(-1.5,2.43)
  rect 3.15x3.15 smd: 29(0,0)
  rect 0.508x0.508 smd: 30(-2.134,2.134)
R0603
  rect 0.889x0.762 smd: 1(-0.762,0) 2(0.762,0)
RN-8P
  rect 1x0.4 smd: 1(0,0) 2(0,-0.8) 3(0,-1.6) 4(0,-2.4) 5(1.858,-2.4) 6(1.858,-1.6) 7(1.858,-0.8) 8(1.858,0)
SD-74737-0033
  round 0.965 hole 0.965 unplated: (-4,3.73) (-4,-10.52) (0.7,3.73) (0.7,-10.52) (5.7,3.73) (5.7,-10.52) (10.3,1.4) (10.3,-3.4) (10.3,-8.2)
  round 2.032 hole 1.575x1: (4.1,1.4)
  round 2.032 hole 1.575: (4.1,-8.2)
  rect 2.032x0.508 smd: 1(0,0) 2(0,-0.8) 3(0,-1.6) 4(0,-2.4) 5(0,-3.2) 6(0,-4) 7(0,-4.8) 8(0,-5.6) 9(0,-6.4) 10(0,-7.2) 11(8.2,-6.8) 12(8.2,-6) 13(8.2,-5.2) 14(8.2,-4.4) 15(8.2,-3.6) 16(8.2,-2.8) 17(8.2,-2) 18(8.2,-1.2) 19(8.2,-0.4) 20(8.2,0.4)
  rect 2.032x2.032 hole 1.067: 21(3.2,3.73) 22(-6.8,3.73) 23(-16.8,3.73) 24(-26.8,3.73) 25(-26.8,-4.85) 26(-21.8,-10.52) 27(-11.8,-10.52) 28(-6.8,-7.35) 29(-6.8,-1.95) 30(-1.8,-10.52) 31(8.2,-10.52)
SMTDR75-100M
  rect 2.349x3.5 smd: 1(-3.025,0) 2(3.025,0)
SOT23
  rect 0.91x0.91 smd: 1(0,0) 2(1.9,0)
  rect 0.91x1.27 smd: 3(0.97,2.03)
unnamed
  round 6.35 hole 3.302: 1(0,0)
unnamed#2
  rect 5x5 hole 3: 1(0,0)
unnamed#3
  round 1.016 smd: 1(0,0)
VGA
  round 1.6 hole 1.04: 1(-2.45,1.154) 2(-2.45,-1.136) 3(-2.45,-3.426) 4(-2.45,-5.716) 5(-2.45,-8.006) 6(0,2.29) 7(0,0) 8(0,-2.29) 9(0,-4.58) 10(0,-6.87) 11(2.45,1.154) 12(2.45,-1.136) 13(2.45,-3.426) 14(2.45,-5.716) 15(2.45,-8.006)
  round 4.7 hole 3.5: 16(0,-15.672) 17(0,9.328)
XT49M-CRYSTAL
  rect 5.563x2.057 smd: 1(0,0) 2(9.55,0)

## Nets
+3.3V: C22.1 C23.1 C24.1 C25.1 C26.1 C27.1 C28.1 C29.1 C30.1 C44.1 C45.1 C46.1 C47.1 C48.1 C49.1 C50.1 C51.1 C52.1 C66.1 C67.1 C68.1 C69.1 C70.1 C71.1 C72.1 C73.1 C74.1 C88.1 C89.1 C90.1 C91.1 C92.1 C93.1 C94.1 C95.1 C96.1 C108.1 C109.1 C111.1 C114.1 C117.1 C118.1 C126.1 C127.1 C132.1 C147.1 C148.1 C149.1 C150.1 C151.1 C152.1 D1.2 D2.2 D3.2 D4.2 J1.14(LD2_A) J2.14(LD2_A) J3.14(LD2_A) J4.14(LD2_A) J9.4 J9.6 J11.39 J11.40 L5.1 L6.1 L7.1 L8.1 L9.1 L10.1 L11.1 L12.1 L14.2 LED1.1(ANODE) LED2.1(ANODE) LED3.1(ANODE) LED4.1(ANODE) LED5.1(ANODE) R2.2 R3.2 R9.1 R11.1 R12.2 R13.2 R14.2 R15.2 R16.2 R17.2 R19.2 R20.2 R21.2 R27.2 R29.2 R34.1 R36.1 R37.2 R38.2 R39.2 R40.2 R41.2 R42.2 R43.2 R44.2 R45.2 R53.2 R54.2 R59.1 R61.1 R62.2 R63.2 R64.2 R65.2 R66.2 R67.2 R68.2 R69.2 R70.2 R77.2 R78.2 R84.1 R86.1 R87.2 R88.2 R89.2 R90.2 R91.2 R92.2 R93.2 R94.2 R95.2 R101.2 R102.2 R104.1 R107.2 R108.2 R110.1 R111.2 R112.2 R114.1 R117.2 R118.2 R120.1 R130.2 R131.2 R143.1 U1.10(AVDD33#10) U1.20(DVDD33#20) U1.26(DVDD33#26) U1.37(DVDD33#37) U1.49(DVDD33#49) U1.60(AVDD33#60) U1.64(VDDREG) U2.10(AVDD33#10) U2.20(DVDD33#20) U2.26(DVDD33#26) U2.37(DVDD33#37) U2.49(DVDD33#49) U2.60(AVDD33#60) U2.64(VDDREG) U3.10(AVDD33#10) U3.20(DVDD33#20) U3.26(DVDD33#26) U3.37(DVDD33#37) U3.49(DVDD33#49) U3.60(AVDD33#60) U3.64(VDDREG) U4.10(AVDD33#10) U4.20(DVDD33#20) U4.26(DVDD33#26) U4.37(DVDD33#37) U4.49(DVDD33#49) U4.60(AVDD33#60) U4.64(VDDREG)
+5.0V: C131.1 C138.1 C139.1 C140.1 C141.1 C142.1 C143.1 CON1.1 CON1.2 CON1.3 CON1.4 CON1.5 CON1.6 CON1.7 CON1.8 J11.2 L13.2 R128.1 R139.1
+12V: C133.1 C134.1 C136.1 C146.1 F1.2 R138.1 R142.1 U6.2(IN) U7.2(IN)
GND: C17.2 C18.2 C19.2 C20.2 C21.2 C22.2 C23.2 C24.2 C25.2 C26.2 C27.2 C28.2 C29.2 C30.2 C31.2 C32.2 C33.2 C34.2 C35.2 C36.2 C37.2 C38.2 C39.2 C40.2 C41.2 C42.2 C43.2 C44.2 C45.2 C46.2 C47.2 C48.2 C49.2 C50.2 C51.2 C52.2 C53.2 C54.2 C55.2 C56.2 C57.2 C58.2 C59.2 C60.2 C61.2 C62.2 C63.2 C64.2 C65.2 C66.2 C67.2 C68.2 C69.2 C70.2 C71.2 C72.2 C73.2 C74.2 C75.2 C76.2 C77.2 C78.2 C79.2 C80.2 C81.2 C82.2 C83.2 C84.2 C85.2 C86.2 C87.2 C88.2 C89.2 C90.2 C91.2 C92.2 C93.2 C94.2 C95.2 C96.2 C97.2 C98.2 C99.2 C100.2 C101.2 C102.2 C103.2 C104.2 C105.2 C106.2 C107.2 C108.2 C109.2 C110.2 C111.2 C112.2 C113.2 C114.2 C115.2 C116.2 C117.2 C118.2 C119.2 C120.2 C121.2 C122.2 C123.2 C124.2 C125.2 C126.2 C127.2 C128.2 C129.2 C130.2 C131.2 C132.2 C133.2 C134.2 C136.2 C137.2 C138.2 C139.2 C140.2 C141.2 C142.2 C143.2 C146.2 C147.2 C148.2 C149.2 C150.2 C151.2 C152.2 C153.2 C261.1 CN1.1 CN1.2 CON1.9 CON1.10 CON1.19 CON1.20 CON1.29 CON1.30 CON1.39 CON1.40 CON1.49 CON1.50 CON1.59 CON1.60 CON1.69 CON1.70 CON2.9 CON2.10 CON2.19 CON2.20 CON2.29 CON2.30 CON2.39 CON2.40 CON2.49 CON2.50 CON2.59 CON2.60 CON2.69 CON2.70 CON3.9 CON3.10 CON3.19 CON3.20 CON3.29 CON3.30 CON3.39 CON3.40 CON3.49 CON3.50 CON3.59 CON3.60 CON3.69 CON3.70 CON4.9 CON4.10 CON4.15 CON4.16 CON4.21 CON4.22 CON4.27 CON4.28 CON4.33 CON4.34 CON4.39 CON4.40 CON4.49 CON4.50 CON4.59 CON4.60 CON4.69 CON4.70 D1.1 D2.1 D3.1 D4.1 J1.12(LD1_K) J1.15(M1) J1.16(M2) J2.12(LD1_K) J2.15(M1) J2.16(M2) J3.12(LD1_K) J3.15(M1) J3.16(M2) J4.12(LD1_K) J4.15(M1) J4.16(M2) J5.1(VEET1) J5.9(VEER1) J5.10(VEER2) J5.11(VEER3) J5.14(VEER4) J5.17(VEET2) J5.20(VEET3) J6.1(VEET1) J6.9(VEER1) J6.10(VEER2) J6.11(VEER3) J6.14(VEER4) J6.17(VEET2) J6.20(VEET3) J7.1(VEET1) J7.9(VEER1) J7.10(VEER2) J7.11(VEER3) J7.14(VEER4) J7.17(VEET2) J7.20(VEET3) J8.1(VEET1) J8.9(VEER1) J8.10(VEER2) J8.11(VEER3) J8.14(VEER4) J8.17(VEET2) J8.20(VEET3) J9.2 J9.10 J10.5(GND) J10.6(SH1) J10.7(SH2) J10.8(SH3) J10.9(SH4) J11.1 J11.37 J11.38 J23.5 J23.6 J23.7 J23.8 J23.10 KEY1.2(P2) KEY2.2(P2) R4.1 R6.1 R8.1 R10.1 R18.2 R22.2 R23.1 R24.1 R25.1 R31.1 R32.1 R33.1 R35.1 R46.2 R47.2 R48.1 R49.1 R50.1 R56.1 R57.1 R58.1 R60.1 R71.2 R72.2 R73.1 R74.1 R75.1 R80.1 R82.1 R83.1 R85.1 R96.2 R97.2 R98.1 R99.1 R100.1 R103.1 R105.1 R106.1 R109.1 R113.1 R115.1 R116.1 R119.1 R136.1 R140.2 R141.2 R144.2 R145.2 U1.2(GND#2) U1.4(GND#4) U1.63(GND#63) U1.65(EGND) U2.2(GND#2) U2.4(GND#4) U2.63(GND#63) U2.65(EGND) U3.2(GND#2) U3.4(GND#4) U3.63(GND#63) U3.65(EGND) U4.2(GND#2) U4.4(GND#4) U4.63(GND#63) U4.65(EGND) U5.3(GND) U6.4(GND) U7.4(GND)
CHASSIS: J5.21(G1) J5.22(G2) J5.23(G4) J5.24(G3) J5.25(G5) J5.26(G6) J5.27(G7) J5.28(G8) J5.29(G9) J5.30(G10) J5.31(G11) J6.21(G1) J6.22(G2) J6.23(G4) J6.24(G3) J6.25(G5) J6.26(G6) J6.27(G7) J6.28(G8) J6.29(G9) J6.30(G10) J6.31(G11) J7.21(G1) J7.22(G2) J7.23(G4) J7.24(G3) J7.25(G5) J7.26(G6) J7.27(G7) J7.28(G8) J7.29(G9) J7.30(G10) J7.31(G11) J8.21(G1) J8.22(G2) J8.23(G4) J8.24(G3) J8.25(G5) J8.26(G6) J8.27(G7) J8.28(G8) J8.29(G9) J8.30(G10) J8.31(G11) R105.2 R106.2 R115.2 R116.2
E1_ADVDD10: C19.1 C20.1 C21.1 R1.2 U1.7(AVDD10#7) U1.13(AVDD10#13) U1.59(AVDD10#59)
E1_COL: CON3.72 R10.2 R16.1 R25.2 U1.31(COL/MODE)
E1_CRS: CON3.74 R9.2 U1.32(CRS)
E1_DVDD10: C17.1 C18.1 C31.1 C32.1 L1.2 R1.1 U1.33(DVDD10#33) U1.48(DVDD10#48)
E1_ENSWREG: R13.1 U1.57(ENSWREG)
E1_GTXC: CON3.22 U1.34(GTX_CLK)
E1_MDC: CON3.57 R2.1 U1.53(MDC)
E1_MDIO: CON3.61 R3.1 U1.54(MDIO)
E1_PHY_AD0/LED0: R7.1 R17.1 U1.50(LED0_PHYAD0)
E1_PHY_AD1/LED1: R5.1 R18.1 U1.51(LED1_PHYAD1)
E1_PHY_MDI0_N: J1.P3(TRD0-) U1.6(MDI[0]-)
E1_PHY_MDI0_P: J1.P2(TRD0+) U1.5(MDI[0]+)
E1_PHY_MDI1_N: J1.P7(TRD1-) U1.9(MDI[1]-)
E1_PHY_MDI1_P: J1.P4(TRD1+) U1.8(MDI[1]+)
E1_PHY_MDI2_N: J1.P6(TRD2-) U1.12(MDI[2]-)
E1_PHY_MDI2_P: J1.P5(TRD2+) U1.11(MDI[2]+)
E1_PHY_MDI3_N: J1.P9(TRD3-) U1.15(MDI[3]-)
E1_PHY_MDI3_P: J1.P8(TRD3+) U1.14(MDI[3]+)
E1_PME: R12.1 U1.55(PME)
E1_REGOUT: L1.1 U1.3(REG_OUT)
E1_RESET: CON3.26 U1.38(PHYRSTB)
E1_RXC: CON3.54 U1.24(RXCLK)
E1_RXD0: CON3.44 U1.19(RXD0)
E1_RXD1: CON3.46 U1.21(RXD1)
E1_RXD2: CON3.48 U1.22(RXD2)
E1_RXD3: CON3.56 U1.23(RXD3)
E1_RXD4: CON3.58 R19.1 U1.25(RXD4/SELRGV)
E1_RXD5: CON3.62 R14.1 R23.2 U1.27(RXD5/TXDLY)
E1_RXD6: CON3.64 R15.1 R24.2 U1.28(RXD6/RXDLY)
E1_RXD7: CON3.66 R20.1 U1.29(RXD7_AN0)
E1_RXDV: CON3.42 R22.1 U1.18(RXDV/PHY_AD2)
E1_RXER: CON3.68 R21.1 U1.30(RXER_AN1)
E1_TXC: CON3.36 U1.42(TXCLK)
E1_TXD0: CON3.18 U1.36(TXD0)
E1_TXD1: CON3.28 U1.39(TXD1)
E1_TXD2: CON3.32 U1.40(TXD2)
E1_TXD3: CON3.34 U1.41(TXD3)
E1_TXD4: CON3.38 U1.43(TXD4)
E1_TXD5: CON3.51 U1.44(TXD5)
E1_TXD6: CON3.52 U1.45(TXD6)
E1_TXD7: CON3.53 U1.46(TXD7)
E1_TXEN: CON3.24 U1.35(TXEN)
E1_TXER: CON3.55 R6.2 U1.47(TXER)
E2_ADVDD10: C41.1 C42.1 C43.1 R26.2 U2.7(AVDD10#7) U2.13(AVDD10#13) U2.59(AVDD10#59)
E2_COL: CON3.23 R35.2 R44.1 R50.2 U2.31(COL/MODE)
E2_CRS: CON3.16 R34.2 U2.32(CRS)
E2_DVDD10: C39.1 C40.1 C53.1 C54.1 L2.2 R26.1 U2.33(DVDD10#33) U2.48(DVDD10#48)
E2_ENSWREG: R38.1 U2.57(ENSWREG)
E2_GTXC: CON3.73 U2.34(GTX_CLK)
E2_MDC: CON2.12 R27.1 U2.53(MDC)
E2_MDIO: CON2.14 R29.1 U2.54(MDIO)
E2_PHY_AD0/LED0: R28.1 R40.1 U2.50(LED0_PHYAD0)
E2_PHY_AD1/LED1: R30.1 R46.1 U2.51(LED1_PHYAD1)
E2_PHY_MDI0_N: J2.P3(TRD0-) U2.6(MDI[0]-)
E2_PHY_MDI0_P: J2.P2(TRD0+) U2.5(MDI[0]+)
E2_PHY_MDI1_N: J2.P7(TRD1-) U2.9(MDI[1]-)
E2_PHY_MDI1_P: J2.P4(TRD1+) U2.8(MDI[1]+)
E2_PHY_MDI2_N: J2.P6(TRD2-) U2.12(MDI[2]-)
E2_PHY_MDI2_P: J2.P5(TRD2+) U2.11(MDI[2]+)
E2_PHY_MDI3_N: J2.P9(TRD3-) U2.15(MDI[3]-)
E2_PHY_MDI3_P: J2.P8(TRD3+) U2.14(MDI[3]+)
E2_PME: R37.1 U2.55(PME)
E2_REGOUT: L2.1 U2.3(REG_OUT)
E2_RESET: CON3.65 U2.38(PHYRSTB)
E2_RXC: CON3.21 U2.24(RXCLK)
E2_RXD0: CON3.45 U2.19(RXD0)
E2_RXD1: CON3.43 U2.21(RXD1)
E2_RXD2: CON3.41 U2.22(RXD2)
E2_RXD3: CON3.37 U2.23(RXD3)
E2_RXD4: CON3.35 R45.1 U2.25(RXD4/SELRGV)
E2_RXD5: CON3.33 R43.1 R48.2 U2.27(RXD5/TXDLY)
E2_RXD6: CON3.31 R39.1 R49.2 U2.28(RXD6/RXDLY)
E2_RXD7: CON3.27 R41.1 U2.29(RXD7_AN0)
E2_RXDV: CON3.47 R47.1 U2.18(RXDV/PHY_AD2)
E2_RXER: CON3.25 R42.1 U2.30(RXER_AN1)
E2_TXC: CON2.5 U2.42(TXCLK)
E2_TXD0: CON3.67 U2.36(TXD0)
E2_TXD1: CON3.63 U2.39(TXD1)
E2_TXD2: CON2.1 U2.40(TXD2)
E2_TXD3: CON2.3 U2.41(TXD3)
E2_TXD4: CON2.2 U2.43(TXD4)
E2_TXD5: CON2.4 U2.44(TXD5)
E2_TXD6: CON2.6 U2.45(TXD6)
E2_TXD7: CON2.8 U2.46(TXD7)
E2_TXEN: CON3.71 U2.35(TXEN)
E2_TXER: CON2.7 R32.2 U2.47(TXER)
E3_ADVDD10: C63.1 C64.1 C65.1 R51.2 U3.7(AVDD10#7) U3.13(AVDD10#13) U3.59(AVDD10#59)
E3_COL: CON2.46 R60.2 R70.1 R75.2 U3.31(COL/MODE)
E3_CRS: CON2.48 R59.2 U3.32(CRS)
E3_DVDD10: C61.1 C62.1 C75.1 C76.1 L3.2 R51.1 U3.33(DVDD10#33) U3.48(DVDD10#48)
E3_ENSWREG: R63.1 U3.57(ENSWREG)
E3_GTXC: CON2.16 U3.34(GTX_CLK)
E3_MDC: CON2.41 R53.1 U3.53(MDC)
E3_MDIO: CON2.45 R54.1 U3.54(MDIO)
E3_PHY_AD0/LED0: R52.1 R64.1 U3.50(LED0_PHYAD0)
E3_PHY_AD1/LED1: R55.1 R71.1 U3.51(LED1_PHYAD1)
E3_PHY_MDI0_N: J3.P3(TRD0-) U3.6(MDI[0]-)
E3_PHY_MDI0_P: J3.P2(TRD0+) U3.5(MDI[0]+)
E3_PHY_MDI1_N: J3.P7(TRD1-) U3.9(MDI[1]-)
E3_PHY_MDI1_P: J3.P4(TRD1+) U3.8(MDI[1]+)
E3_PHY_MDI2_N: J3.P6(TRD2-) U3.12(MDI[2]-)
E3_PHY_MDI2_P: J3.P5(TRD2+) U3.11(MDI[2]+)
E3_PHY_MDI3_N: J3.P9(TRD3-) U3.15(MDI[3]-)
E3_PHY_MDI3_P: J3.P8(TRD3+) U3.14(MDI[3]+)
E3_PME: R62.1 U3.55(PME)
E3_REGOUT: L3.1 U3.3(REG_OUT)
E3_RESET: CON2.32 U3.38(PHYRSTB)
E3_RXC: CON2.11 U3.24(RXCLK)
E3_RXD0: CON2.22 U3.19(RXD0)
E3_RXD1: CON2.24 U3.21(RXD1)
E3_RXD2: CON2.26 U3.22(RXD2)
E3_RXD3: CON2.28 U3.23(RXD3)
E3_RXD4: CON2.34 R65.1 U3.25(RXD4/SELRGV)
E3_RXD5: CON2.36 R68.1 R73.2 U3.27(RXD5/TXDLY)
E3_RXD6: CON2.38 R69.1 R74.2 U3.28(RXD6/RXDLY)
E3_RXD7: CON2.42 R66.1 U3.29(RXD7_AN0)
E3_RXDV: CON2.18 R72.1 U3.18(RXDV/PHY_AD2)
E3_RXER: CON2.44 R67.1 U3.30(RXER_AN1)
E3_TXC: CON2.25 U3.42(TXCLK)
E3_TXD0: CON2.15 U3.36(TXD0)
E3_TXD1: CON2.17 U3.39(TXD1)
E3_TXD2: CON2.21 U3.40(TXD2)
E3_TXD3: CON2.23 U3.41(TXD3)
E3_TXD4: CON2.27 U3.43(TXD4)
E3_TXD5: CON2.31 U3.44(TXD5)
E3_TXD6: CON2.33 U3.45(TXD6)
E3_TXD7: CON2.35 U3.46(TXD7)
E3_TXEN: CON2.13 U3.35(TXEN)
E3_TXER: CON2.37 R57.2 U3.47(TXER)
E4_ADVDD10: C85.1 C86.1 C87.1 R76.2 U4.7(AVDD10#7) U4.13(AVDD10#13) U4.59(AVDD10#59)
E4_COL: CON2.78 R85.2 R93.1 R100.2 U4.31(COL/MODE)
E4_CRS: CON2.80 R84.2 U4.32(CRS)
E4_DVDD10: C83.1 C84.1 C97.1 C98.1 L4.2 R76.1 U4.33(DVDD10#33) U4.48(DVDD10#48)
E4_ENSWREG: R88.1 U4.57(ENSWREG)
E4_GTXC: CON2.79 U4.34(GTX_CLK)
E4_MDC: CON2.47 R77.1 U4.53(MDC)
E4_MDIO: CON2.43 R78.1 U4.54(MDIO)
E4_PHY_AD0/LED0: R79.1 R91.1 U4.50(LED0_PHYAD0)
E4_PHY_AD1/LED1: R81.1 R96.1 U4.51(LED1_PHYAD1)
E4_PHY_MDI0_N: J4.P3(TRD0-) U4.6(MDI[0]-)
E4_PHY_MDI0_P: J4.P2(TRD0+) U4.5(MDI[0]+)
E4_PHY_MDI1_N: J4.P7(TRD1-) U4.9(MDI[1]-)
E4_PHY_MDI1_P: J4.P4(TRD1+) U4.8(MDI[1]+)
E4_PHY_MDI2_N: J4.P6(TRD2-) U4.12(MDI[2]-)
E4_PHY_MDI2_P: J4.P5(TRD2+) U4.11(MDI[2]+)
E4_PHY_MDI3_N: J4.P9(TRD3-) U4.15(MDI[3]-)
E4_PHY_MDI3_P: J4.P8(TRD3+) U4.14(MDI[3]+)
E4_PME: R87.1 U4.55(PME)
E4_REGOUT: L4.1 U4.3(REG_OUT)
E4_RESET: CON2.73 U4.38(PHYRSTB)
E4_RXC: CON2.58 U4.24(RXCLK)
E4_RXD0: CON2.54 U4.19(RXD0)
E4_RXD1: CON2.56 U4.21(RXD1)
E4_RXD2: CON2.62 U4.22(RXD2)
E4_RXD3: CON2.64 U4.23(RXD3)
E4_RXD4: CON2.66 R94.1 U4.25(RXD4/SELRGV)
E4_RXD5: CON2.68 R90.1 R98.2 U4.27(RXD5/TXDLY)
E4_RXD6: CON2.72 R92.1 R99.2 U4.28(RXD6/RXDLY)
E4_RXD7: CON2.74 R89.1 U4.29(RXD7_AN0)
E4_RXDV: CON2.52 R97.1 U4.18(RXDV/PHY_AD2)
E4_RXER: CON2.76 R95.1 U4.30(RXER_AN1)
E4_TXC: CON2.63 U4.42(TXCLK)
E4_TXD0: CON2.75 U4.36(TXD0)
E4_TXD1: CON2.71 U4.39(TXD1)
E4_TXD2: CON2.67 U4.40(TXD2)
E4_TXD3: CON2.65 U4.41(TXD3)
E4_TXD4: CON2.61 U4.43(TXD4)
E4_TXD5: CON2.57 U4.44(TXD5)
E4_TXD6: CON2.55 U4.45(TXD6)
E4_TXD7: CON2.53 U4.46(TXD7)
E4_TXEN: CON2.77 U4.35(TXEN)
E4_TXER: CON2.51 R82.2 U4.47(TXER)
EPAD1: U5.29
EPAD2: U5.30
EX_IO1_1N: J11.3 RN1.6
EX_IO1_1P: J11.4 RN1.5
EX_IO1_2N: J11.5 RN1.8
EX_IO1_2P: J11.6 RN1.7
EX_IO1_3N: J11.7 RN2.6
EX_IO1_3P: J11.8 RN2.5
EX_IO1_4N: J11.9 RN2.8
EX_IO1_4P: J11.10 RN2.7
EX_IO1_5N: J11.11 RN3.6
EX_IO1_5P: J11.12 RN3.5
EX_IO1_6N: J11.13 RN3.8
EX_IO1_6P: J11.14 RN3.7
EX_IO1_7N: J11.15 RN4.6
EX_IO1_7P: J11.16 RN4.5
EX_IO1_8N: J11.17 RN4.8
EX_IO1_8P: J11.18 RN4.7
EX_IO1_9N: J11.19 RN5.6
EX_IO1_9P: J11.20 RN5.5
EX_IO1_10N: J11.21 RN5.8
EX_IO1_10P: J11.22 RN5.7
EX_IO1_11N: J11.23 RN6.6
EX_IO1_11P: J11.24 RN6.5
EX_IO1_12N: J11.25 RN6.8
EX_IO1_12P: J11.26 RN6.7
EX_IO1_13N: J11.27 RN7.6
EX_IO1_13P: J11.28 RN7.5
EX_IO1_14N: J11.29 RN7.8
EX_IO1_14P: J11.30 RN7.7
EX_IO1_15N: J11.31 RN8.6
EX_IO1_15P: J11.32 RN8.5
EX_IO1_16N: J11.33 RN8.8
EX_IO1_16P: J11.34 RN8.7
EX_IO1_17N: J11.35 RN9.8
EX_IO1_17P: J11.36 RN9.7
FPGA_TCK: CON3.77 D1.3 R121.2
FPGA_TDI: CON3.78 D4.3 R124.2
FPGA_TDO: CON3.79 D2.3 R122.2
FPGA_TMS: CON3.80 D3.3 R123.2
IO1_1N: CON4.78 RN1.3
IO1_1P: CON4.76 RN1.4
IO1_2N: CON4.68 RN1.1
IO1_2P: CON4.66 RN1.2
IO1_3N: CON4.74 RN2.3
IO1_3P: CON4.72 RN2.4
IO1_4N: CON3.1 RN2.1
IO1_4P: CON3.3 RN2.2
IO1_5N: CON3.4 RN3.3
IO1_5P: CON3.2 RN3.4
IO1_6N: CON3.6 RN3.1
IO1_6P: CON3.8 RN3.2
IO1_7N: CON3.14 RN4.3
IO1_7P: CON3.12 RN4.4
IO1_8N: CON3.7 RN4.1
IO1_8P: CON3.5 RN4.2
IO1_9N: CON3.17 RN5.3
IO1_9P: CON3.15 RN5.4
IO1_10N: CON3.13 RN5.1
IO1_10P: CON3.11 RN5.2
IO1_11N: CON4.64 RN6.3
IO1_11P: CON4.62 RN6.4
IO1_12N: CON4.77 RN6.1
IO1_12P: CON4.75 RN6.2
IO1_13N: CON4.73 RN7.3
IO1_13P: CON4.71 RN7.4
IO1_14N: CON4.67 RN7.1
IO1_14P: CON4.65 RN7.2
IO1_15N: CON4.63 RN8.3
IO1_15P: CON4.61 RN8.4
IO1_16N: CON4.57 RN8.1
IO1_16P: CON4.55 RN8.2
IO1_17N: CON4.58 RN9.1
IO1_17P: CON4.56 RN9.2
KEY1: CON4.43 R133.2
KEY2: CON4.41 R132.2
LED1: CON4.44 R135.1
LED2: CON4.42 R134.1
MGT_CLK1_N: CON4.38
MGT_CLK1_P: CON4.36
MGT_RX0_N: C14.1 CON4.32
MGT_RX0_P: C12.1 CON4.30
MGT_RX1_N: C16.2 CON4.37
MGT_RX1_P: C15.2 CON4.35
MGT_RX2_N: C6.1 CON4.20
MGT_RX2_P: C4.1 CON4.18
MGT_RX3_N: C9.2 CON4.25
MGT_RX3_P: C7.2 CON4.23
MGT_TX0_N: C10.1 CON4.26
MGT_TX0_P: C8.1 CON4.24
MGT_TX1_N: C13.2 CON4.31
MGT_TX1_P: C11.2 CON4.29
MGT_TX2_N: C2.1 CON4.14
MGT_TX2_P: C1.1 CON4.12
MGT_TX3_N: C5.2 CON4.19
MGT_TX3_P: C3.2 CON4.17
SFP1_LOSS: CON4.45 J5.8(RX_LOSS) R102.1
SFP1_RX_N: C14.2 J5.12(-RX)
SFP1_RX_P: C12.2 J5.13(+RX)
SFP1_TX_DIS: CON4.51 J5.3(TX_DISABLE) R101.1 R103.2
SFP1_TX_N: C10.2 J5.19(-TX)
SFP1_TX_P: C8.2 J5.18(+TX)
SFP2_LOSS: CON4.47 J6.8(RX_LOSS) R108.1
SFP2_RX_N: C16.1 J6.12(-RX)
SFP2_RX_P: C15.1 J6.13(+RX)
SFP2_TX_DIS: CON4.53 J6.3(TX_DISABLE) R107.1 R109.2
SFP2_TX_N: C13.1 J6.19(-TX)
SFP2_TX_P: C11.1 J6.18(+TX)
SFP3_LOSS: CON4.46 J7.8(RX_LOSS) R112.1
SFP3_RX_N: C6.2 J7.12(-RX)
SFP3_RX_P: C4.2 J7.13(+RX)
SFP3_TX_DIS: CON4.52 J7.3(TX_DISABLE) R111.1 R113.2
SFP3_TX_N: C2.2 J7.19(-TX)
SFP3_TX_P: C1.2 J7.18(+TX)
SFP4_LOSS: CON4.48 J8.8(RX_LOSS) R118.1
SFP4_RX_N: C9.1 J8.12(-RX)
SFP4_RX_P: C7.1 J8.13(+RX)
SFP4_TX_DIS: CON4.54 J8.3(TX_DISABLE) R117.1 R119.2
SFP4_TX_N: C5.1 J8.19(-TX)
SFP4_TX_P: C3.1 J8.18(+TX)
UART1_RXD: CON1.16 R126.1 U5.26(TXD)
UART1_TXD: CON1.18 R127.1 U5.25(RXD)
VGA_B: J23.3 RN18.6 RN18.7 RN18.8 RN19.4 RN19.8 RN20.4
VGA_B0: CON1.73 RN20.1
VGA_B1: CON1.65 RN19.3
VGA_B2: CON1.67 RN19.1
VGA_B3: CON1.63 RN18.3
VGA_B4: CON1.61 RN18.1 RN18.2
VGA_G: J23.2 RN13.6 RN13.7 RN13.8 RN14.4 RN14.8 RN15.4 RN17.4
VGA_G0: CON1.71 RN16.1
VGA_G1: CON1.33 RN15.1
VGA_G2: CON1.32 RN14.3
VGA_G3: CON1.23 RN14.1
VGA_G4: CON1.31 RN13.3
VGA_G5: CON1.27 RN13.1 RN13.2
VGA_HS: CON1.75 R183.2
VGA_R: J23.1 RN10.6 RN10.7 RN10.8 RN11.4 RN11.8 RN12.4
VGA_R0: CON1.26 RN12.1
VGA_R1: CON1.22 RN11.3
VGA_R2: CON1.24 RN11.1
VGA_R3: CON1.21 RN10.3
VGA_R4: CON1.28 RN10.1 RN10.2
VGA_VS: CON1.77 R184.2
XADC_VN: CON1.51
XADC_VP: CON1.53
N27192: R36.2 U2.56(INT)
N27228: C60.1 U2.62(CKXTAL2) Y2.2
N27236: C59.1 U2.61(CKXTAL1) Y2.1
N27528: R33.2 U2.58(RSET)
N27574: C56.1 J2.11(LD1_A) R30.2
N27658: C57.1 C58.1 J2.P1(CT)
N27674: J2.P10(CASE) R31.2
N27678: C55.1 J2.13(LD2_K) R28.2
N16762130: C154.2 R145.1
N16762134: C145.2 L14.1 U7.3(SW)
N16762178: R143.2 R144.1 U7.5(FB)
N16762338: C153.1 U7.8(SS)
N16762406: C145.1 U7.1(BS)
N16762558: C154.1 U7.6(COMP)
N16762594: R142.2 U7.7(EN)
N16762990: C144.2 R141.1
N16762998: R139.2 R140.1 U6.5(FB)
N16763018: C135.2 L13.1 U6.3(SW)
N16763122: C137.1 U6.8(SS)
N16763186: C135.1 U6.1(BS)
N16763210: C144.1 U6.6(COMP)
N16763214: R138.2 U6.7(EN)
N16786140: R128.2 R129.2 U5.7(REGIN) U5.8(VBUS)
N16786264: J10.2(D-) U5.5(D-)
N16786294: J10.1(VCC) R129.1
N16786323: J10.3(D+) U5.4(D+)
N16786347: R125.1 U5.9(R\S\T\)
N16786363: C129.1 C130.1 R125.2 U5.6(VDD)
N16786586: LED4.2(CATHODE) R127.2
N16786620: LED3.2(CATHODE) R126.2
N16880171: CN1.3 SW1.2 SW1.5
N16880223: F1.1 SW1.3 SW1.6
N16921458: R61.2 U3.56(INT)
N16921459: C82.1 U3.62(CKXTAL2) Y3.2
N16921461: C81.1 U3.61(CKXTAL1) Y3.1
N16921489: R58.2 U3.58(RSET)
N16921498: C78.1 J3.11(LD1_A) R55.2
N16921507: C79.1 C80.1 J3.P1(CT)
N16921510: J3.P10(CASE) R56.2
N16921511: C77.1 J3.13(LD2_K) R52.2
N16923103: R86.2 U4.56(INT)
N16923104: C104.1 U4.62(CKXTAL2) Y4.2
N16923106: C103.1 U4.61(CKXTAL1) Y4.1
N16923134: R83.2 U4.58(RSET)
N16923143: C100.1 J4.11(LD1_A) R81.2
N16923152: C101.1 C102.1 J4.P1(CT)
N16923155: J4.P10(CASE) R80.2
N16923156: C99.1 J4.13(LD2_K) R79.2
N16924748: R11.2 U1.56(INT)
N16924749: C38.1 U1.62(CKXTAL2) Y1.2
N16924751: C37.1 U1.61(CKXTAL1) Y1.1
N16924779: R8.2 U1.58(RSET)
N16924788: C34.1 J1.11(LD1_A) R5.2
N16924797: C35.1 C36.1 J1.P1(CT)
N16924800: J1.P10(CASE) R4.2
N16924801: C33.1 J1.13(LD2_K) R7.2
N16943156: CON1.37
N16943158: CON1.45
N16943160: CON1.47
N16943168: CON1.25
N16943192: CON1.43
N16943194: CON1.41
N16943509: CON1.58
N16943511: CON1.56
N16943514: CON1.46
N16943516: CON1.48
N16943518: CON1.36
N16943520: CON1.38
N16943522: CON1.34
N16943530: CON1.44
N16943532: CON1.42
N16943534: CON1.54
N16944663: CON1.35
N16951499: J5.7(RATE_S) R104.2
N16951508: C107.1 C110.1 J5.16(VCCT) L5.2
N16951509: C105.1 C106.1 J5.15(VCCR) L6.2
N16951567: J6.7(RATE_S) R110.2
N16951576: C112.1 C113.1 J6.15(VCCR) L8.2
N16951577: C115.1 C116.1 J6.16(VCCT) L7.2
N16954113: J9.1 R121.1
N16954115: J9.3 R122.1
N16954117: J9.5 R123.1
N16954119: J9.9 R124.1
N16958016: KEY1.1(P1) R131.1 R133.1
N16958025: KEY2.1(P1) R130.1 R132.1
N16958265: LED2.2(CATHODE) R134.2
N16958341: LED1.2(CATHODE) R135.2
N16962503: J7.7(RATE_S) R114.2
N16962521: C121.1 C122.1 J7.16(VCCT) L9.2
N16962523: C119.1 C120.1 J7.15(VCCR) L10.2
N16962639: J8.7(RATE_S) R120.2
N16962657: C123.1 C124.1 J8.15(VCCR) L12.2
N16962659: C125.1 C128.1 J8.16(VCCT) L11.2
N16978799: RN11.5 RN11.6
N16978813: RN12.7 RN12.8
N16978819: RN12.2 RN12.3
N16978825: RN12.5 RN12.6
N16978899: RN14.5 RN14.6
N16978913: RN15.7 RN15.8
N16978919: RN15.2 RN15.3
N16978925: RN15.5 RN15.6
N16978973: RN16.7 RN16.8
N16978979: RN16.2 RN16.3
N16978983: RN16.5 RN16.6
N16978989: RN16.4 RN17.1
N16978991: RN17.7 RN17.8
N16978997: RN17.2 RN17.3
N16979015: RN17.5 RN17.6
N16979095: RN19.5 RN19.6
N16979107: RN20.7 RN20.8
N16979113: RN20.2 RN20.3
N16979117: RN20.5 RN20.6
N16979260: C261.2 J23.16 J23.17
N16979290: J23.13 R183.1
N16979302: J23.14 R184.1
N17041832: LED5.2(CATHODE) R136.2

Pads without a net: CON1 11 12 13 14 15 17 52 55 57 62 64 66 68 72 74 76 78 79 80 81 82; CON2 81 82; CON3 75 76 81 82; CON4 1 2 3 4 5 6 7 8 11 13 79 80 81 82; J5 2 4 5 6; J6 2 4 5 6; J7 2 4 5 6; J8 2 4 5 6; J9 7 8; J10 4; J23 4 9 11 12 15; NOREF 1; NOREF#3 1; NOREF#4 1; NOREF#5 1; NOREF#6 1; NOREF#7 1; NOREF#8 1; NOREF#9 1; NOREF#10 1; NOREF#11 1; NOREF#12 1; NOREF#13 1; NOREF#16 1; NOREF#17 1; NOREF#18 1; NOREF#19 1; RN9 3 4 5 6; RN10 4 5; RN11 2 7; RN13 4 5; RN14 2 7; RN18 4 5; RN19 2 7; SW1 1 4; U1 1 16 17 52; U2 1 16 17 52; U3 1 16 17 52; U4 1 16 17 52; U5 1 2 10 11 12 13 14 15 16 17 18 19 20 21 22 23 24 27 28

## Via types
v1: diameter 0.483, hole 0.305, TOP to BOTTOM, 817 vias

## Routing (per net, layer and track width the routed paths; a pad name or vN(x,y) marks a point on that pad's centre or on a via; arc(x,y) is an arc through that point)
+3.3V: length 257.3
  TOP w0.254: U2.10 v1(30.6,41.23) ; U3.49 v1(38.22,67.54) ; v1(31.17,89.27) 31.05,89.27 30.72,89.59 U4.64 ; U2.26 v1(35.16,38.17) ; U3.26 v1(35.22,59.97) ; U3.64 30.72,67.79 31.05,67.47 v1(31.17,67.47) ; v1(32.54,45.75) 32.66,45.87 U2.60 ; U2.20 v1(32.16,38.18) ; U1.37 v1(38.27,18.44) ; U4.49 v1(38.22,89.34) ; U4.20 v1(32.22,81.78) ; U1.60 v1(32.69,23.9) ; U4.10 v1(30.66,84.83) ; U4.37 v1(38.31,83.83) ; U4.60 32.72,89.49 v1(32.56,89.33) ; U1.26 v1(35.19,16.37) ; U1.64 30.69,24.2 31.01,23.88 v1(31.14,23.88) ; U3.60 32.72,67.7 32.59,67.56 v1(32.59,67.51) ; U2.49 v1(38.16,45.74) ; U1.10 v1(30.63,19.44) ; U1.20 v1(32.19,16.38) ; U1.49 v1(38.19,23.94) ; U3.10 v1(30.66,63.03) ; U2.37 v1(38.24,40.23) ; v1(31.11,45.67) 30.98,45.67 30.66,46 U2.64 ; U3.37 v1(38.31,62.03) ; U4.26 v1(35.22,81.77) ; U3.20 v1(32.22,59.98)
  TOP w0.508: R78.2 R86.1 v1(44.33,94.22) ; R2.2 R3.2 R11.1 v1(43.08,30.48) ; v1(103.78,103.63) 102.22,103.63 LED1.1 ; LED4.1 61.14,87.4 v1(62.67,87.4) 64.62,87.4 LED3.1 ; R29.2 R36.1 ; R29.2 R27.2 ; R29.2 v1(44.03,48.85) ; LED2.1 v1(111.79,103.63) ; R77.2 v1(44.21,91.18) ; LED5.1 v1(8.82,97.02)
  SVCC w0.381: 25.93,1.99 J9.6 ; J9.6 25.93,4.1 ; J9.6 24.88,3.05 ; J9.6 26.99,3.05 ; J9.4 29.53,3.05 ; J9.4 27.42,3.05 ; J9.4 28.47,4.1 ; J9.4 28.47,1.99 ; 4.27,16.78 J1.14 ; J1.14 5.36,15.69 ; J1.14 6.45,16.78 ; J1.14 5.36,17.87 ; 49.65,2.27 J11.40 ; J11.40 49.65,4.38 ; J11.40 50.71,3.32 ; J11.40 48.6,3.32 ; 4.3,57.33 J3.14 ; J3.14 5.39,56.24 ; J3.14 6.48,57.33 ; J3.14 5.39,58.42 ; J4.14 6.48,77.61 ; J4.14 5.39,76.52 ; J4.14 5.39,78.7 ; J4.14 4.3,77.61 ; J11.39 49.65,6.92 ; J11.39 50.71,5.86 ; J11.39 48.6,5.86 ; J11.39 49.65,4.81 ; 4.23,37.06 J2.14 ; J2.14 6.41,37.06 ; J2.14 5.32,35.97 ; J2.14 5.32,38.15
  SVCC w0.508: 58.47,101.32 58.5,101.3 58.5,90.86 61.95,87.4 v1(62.67,87.4)
  BOTTOM w0.254: v1(38.19,23.94) 37.99,23.94 C27.1 ; C45.1 37.96,45.74 v1(38.16,45.74) ; v1(30.66,84.83) 31.35,84.83 C96.1 ; v1(31.14,23.88) 31.52,23.5 C23.1 ; C26.1 32.79,23.8 v1(32.69,23.9) ; v1(38.22,89.34) 38.02,89.34 C94.1 ; v1(38.24,40.23) 37.55,40.23 ; v1(30.6,41.23) 31.28,41.23 C49.1 ; v1(38.22,67.54) 38.02,67.54 C69.1 ; v1(32.59,67.51) 32.82,67.28 C74.1 ; v1(32.16,38.18) 32.25,38.27 C48.1 ; C51.1 35.16,38.85 v1(35.16,38.17) ; v1(35.22,59.97) 35.22,60.65 C71.1 ; v1(32.22,59.98) 32.32,60.07 C73.1 ; v1(32.22,81.78) 32.32,81.87 C93.1 ; v1(31.17,67.47) 31.55,67.09 31.55,66.85 C70.1 ; C67.1 31.35,63.03 v1(30.66,63.03) ; 37.59,18.44 v1(38.27,18.44) ; C30.1 32.28,16.47 v1(32.19,16.38) ; C92.1 32.82,89.07 v1(32.56,89.33) ; C50.1 31.36,45.02 31.36,45.43 v1(31.11,45.67) ; C29.1 31.31,19.44 v1(30.63,19.44) ; C95.1 31.55,88.63 31.55,88.89 v1(31.17,89.27) ; v1(35.22,81.77) 35.22,82.45 C89.1 ; v1(35.19,16.37) 35.19,17.06 C28.1
  BOTTOM w0.305: v1(32.54,45.75) 32.63,45.65 C52.1 ; v1(38.31,83.83) 38.29,83.81 C91.1 ; v1(38.31,62.03) 38.29,62.01 C72.1
  BOTTOM w0.381: J11.40 49.65,4.38 ; J11.40 50.71,3.32 ; J11.40 48.6,3.32 ; J11.40 49.65,2.27 ; 49.65,4.81 J11.39 ; J11.39 48.6,5.86 ; J11.39 50.71,5.86 ; J11.39 49.65,6.92
  BOTTOM w0.508: v1(49.12,68.83) R53.2 R54.2 R61.1 ; R130.2 v1(135.41,100.86) ; C68.1 v1(36.22,60.15) ; v1(107.18,25.25) 107.69,24.74 R108.2 R110.1 R107.2 ; L8.1 v1(96.34,24.26) ; v1(106.66,90.28) R118.2 R120.1 R117.2 ; R59.1 45.95,58.96 46.86,58.04 46.86,54.84 v1(45.26,53.24) ; C46.1 v1(36.3,45.09) ; 37.55,40.23 C47.1 ; v1(36.91,71.55) 36.88,71.55 R62.2 R63.2 ; C90.1 v1(36.48,88.69) ; R92.2 R89.2 R95.2 v1(40.06,75.9) ; R34.1 43.34,37.09 v1(44.02,37.77) ; v1(96.04,16.84) 96.98,15.9 C111.1 C114.1 97.16,19.15 L7.1 ; R111.2 R114.1 R112.2 107.82,68.28 v1(106.98,69.11) ; D4.2 v1(15.4,6.88) ; R101.2 R104.1 R102.2 108.06,46.05 v1(107.21,46.05) ; R39.2 R41.2 R42.2 v1(39.99,32.47) ; R68.2 R65.2 v1(30.92,54.23) ; R12.2 R13.2 34.57,28.68 v1(33.86,27.97) ; C27.1 37.44,23.5 v1(36.4,23.5) 36.09,23.5 35.89,23.29 C24.1 v1(34.04,23.29) ; L11.1 96.98,83.85 C127.1 97.03,82.48 C126.1 v1(95.97,82.35) ; v1(30.92,76.03) R94.2 R90.2 ; v1(42.88,10.57) 43.07,10.77 R16.2 ; R131.2 v1(121.82,104.6) ; L5.1 96.72,39.48 C109.1 96.77,37.98 C108.1 v1(96.9,36.55) ; R70.2 44,54.26 v1(44.17,54.26) ; L9.1 97.03,63.23 C118.1 97.16,61.7 C117.1 96.36,60.13 96.24,60.25 96.16,60.25 v1(96.11,60.3) ; R38.2 R37.2 36.06,50.49 v1(36.75,49.8) ; v1(43.75,16.5) 43.75,16.22 42.77,15.24 R9.1 ; L12.1 v1(95.84,90.2) ; R69.2 R66.2 R67.2 v1(40.06,54.2) ; C88.1 v1(36.22,81.99) ; C66.1 v1(36.24,66.89) ; C30.1 v1(33.38,17.07) C28.1 36.32,17.07 37.16,16.23 C22.1 37.57,16.48 C25.1 37.59,18.44 ; D1.2 v1(34.07,6.76) ; R93.2 43.11,74.9 v1(43.71,74.3) ; v1(40.03,10.5) R21.2 R20.2 R15.2 ; R44.2 v1(43.04,32.47) ; v1(39.95,49.86) 39.31,50.5 R40.2 ; v1(43.46,81.58) 43.46,81.38 42.88,80.8 R84.1 ; v1(97,46.12) 96.7,45.82 L6.1 ; v1(30.1,11.56) R19.2 R14.2 ; v1(36.91,93.4) 36.83,93.4 R87.2 R88.2 ; v1(40.08,71.78) 39.56,72.3 R64.2 ; R43.2 R45.2 v1(30.85,32.43) ; R17.2 39.07,28.7 v1(38.38,28.02) ; v1(39.94,93.42) 39.94,93.65 39.49,94.1 R91.2 ; v1(36.07,38.38) 36.53,37.92 C44.1 ; L10.1 v1(96.05,68.23) ; D2.2 v1(26.7,6.88) ; D3.2 v1(21.11,8.77)
  vias: v1(58.93,19.23) v1(59.33,18.67) v1(59.77,19.23) v1(60.15,18.67) v1(60.53,19.23) v1(60.93,18.69) v1(61.24,19.23)
